# Altium PCB HS-IO-BaseBoard.PcbDoc (part 1 of 4)
Units mm, origin at the board's own origin, x right, y up, seen from the top; angles counter-clockwise.
Board outline 157.7 x 86.4 mm, 6 copper layers (Top Layer, MidLayer1, InternalPlane1, InternalPlane2, MidLayer2, Bottom Layer); 214 components, 240 nets, 782 pads, 260 vias.
Unrouted connection lines stored in the file: 101.
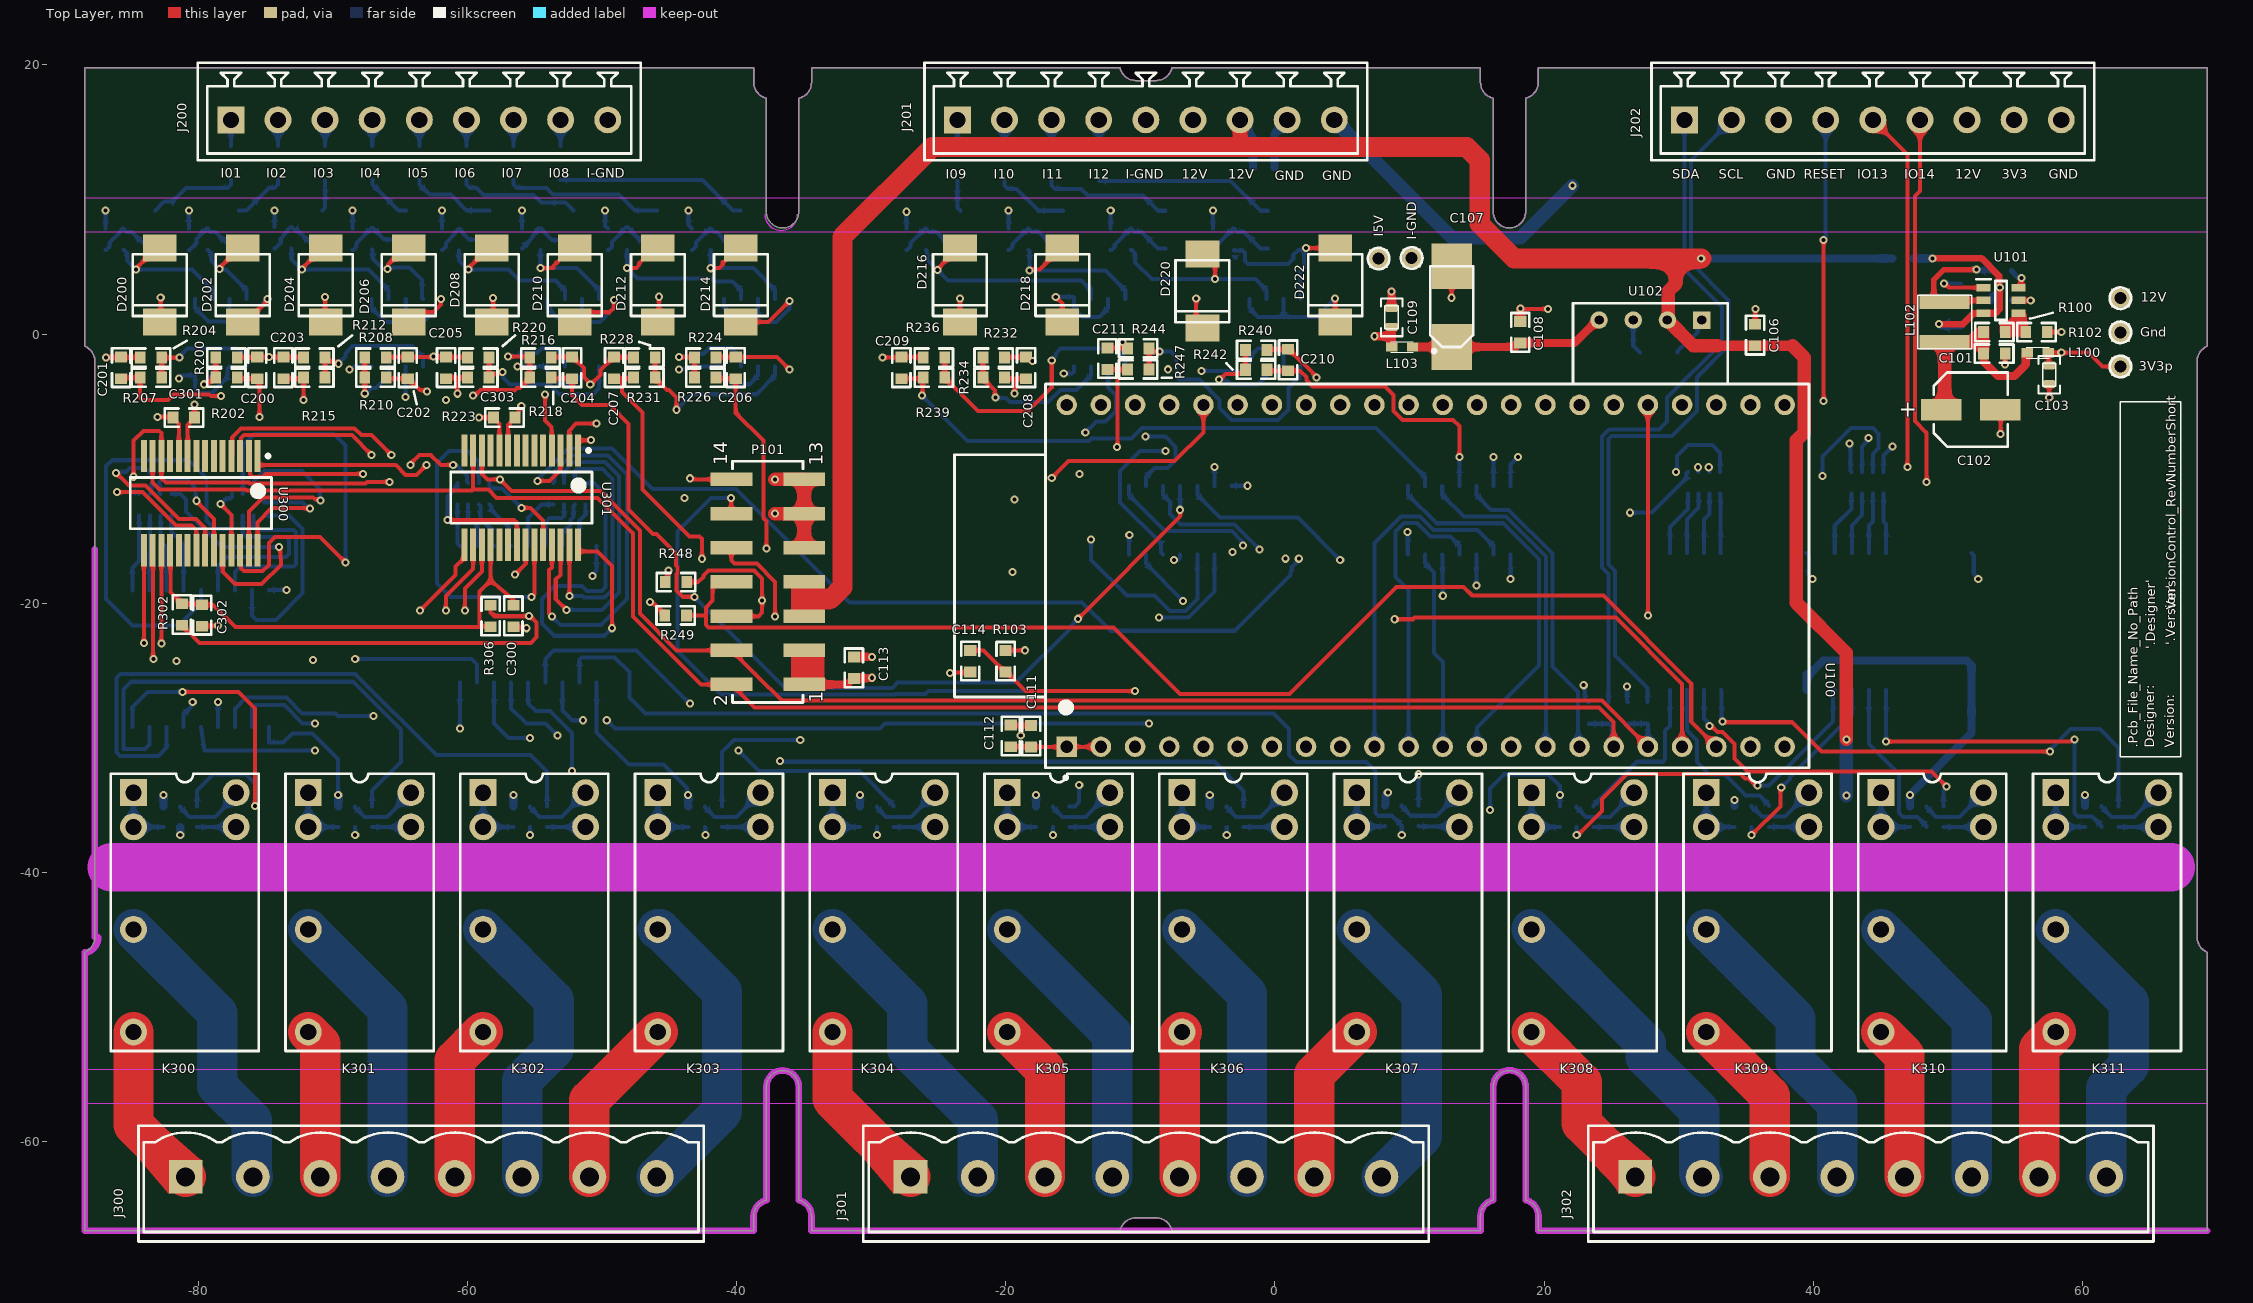
[diagram p0: Top Layer view]
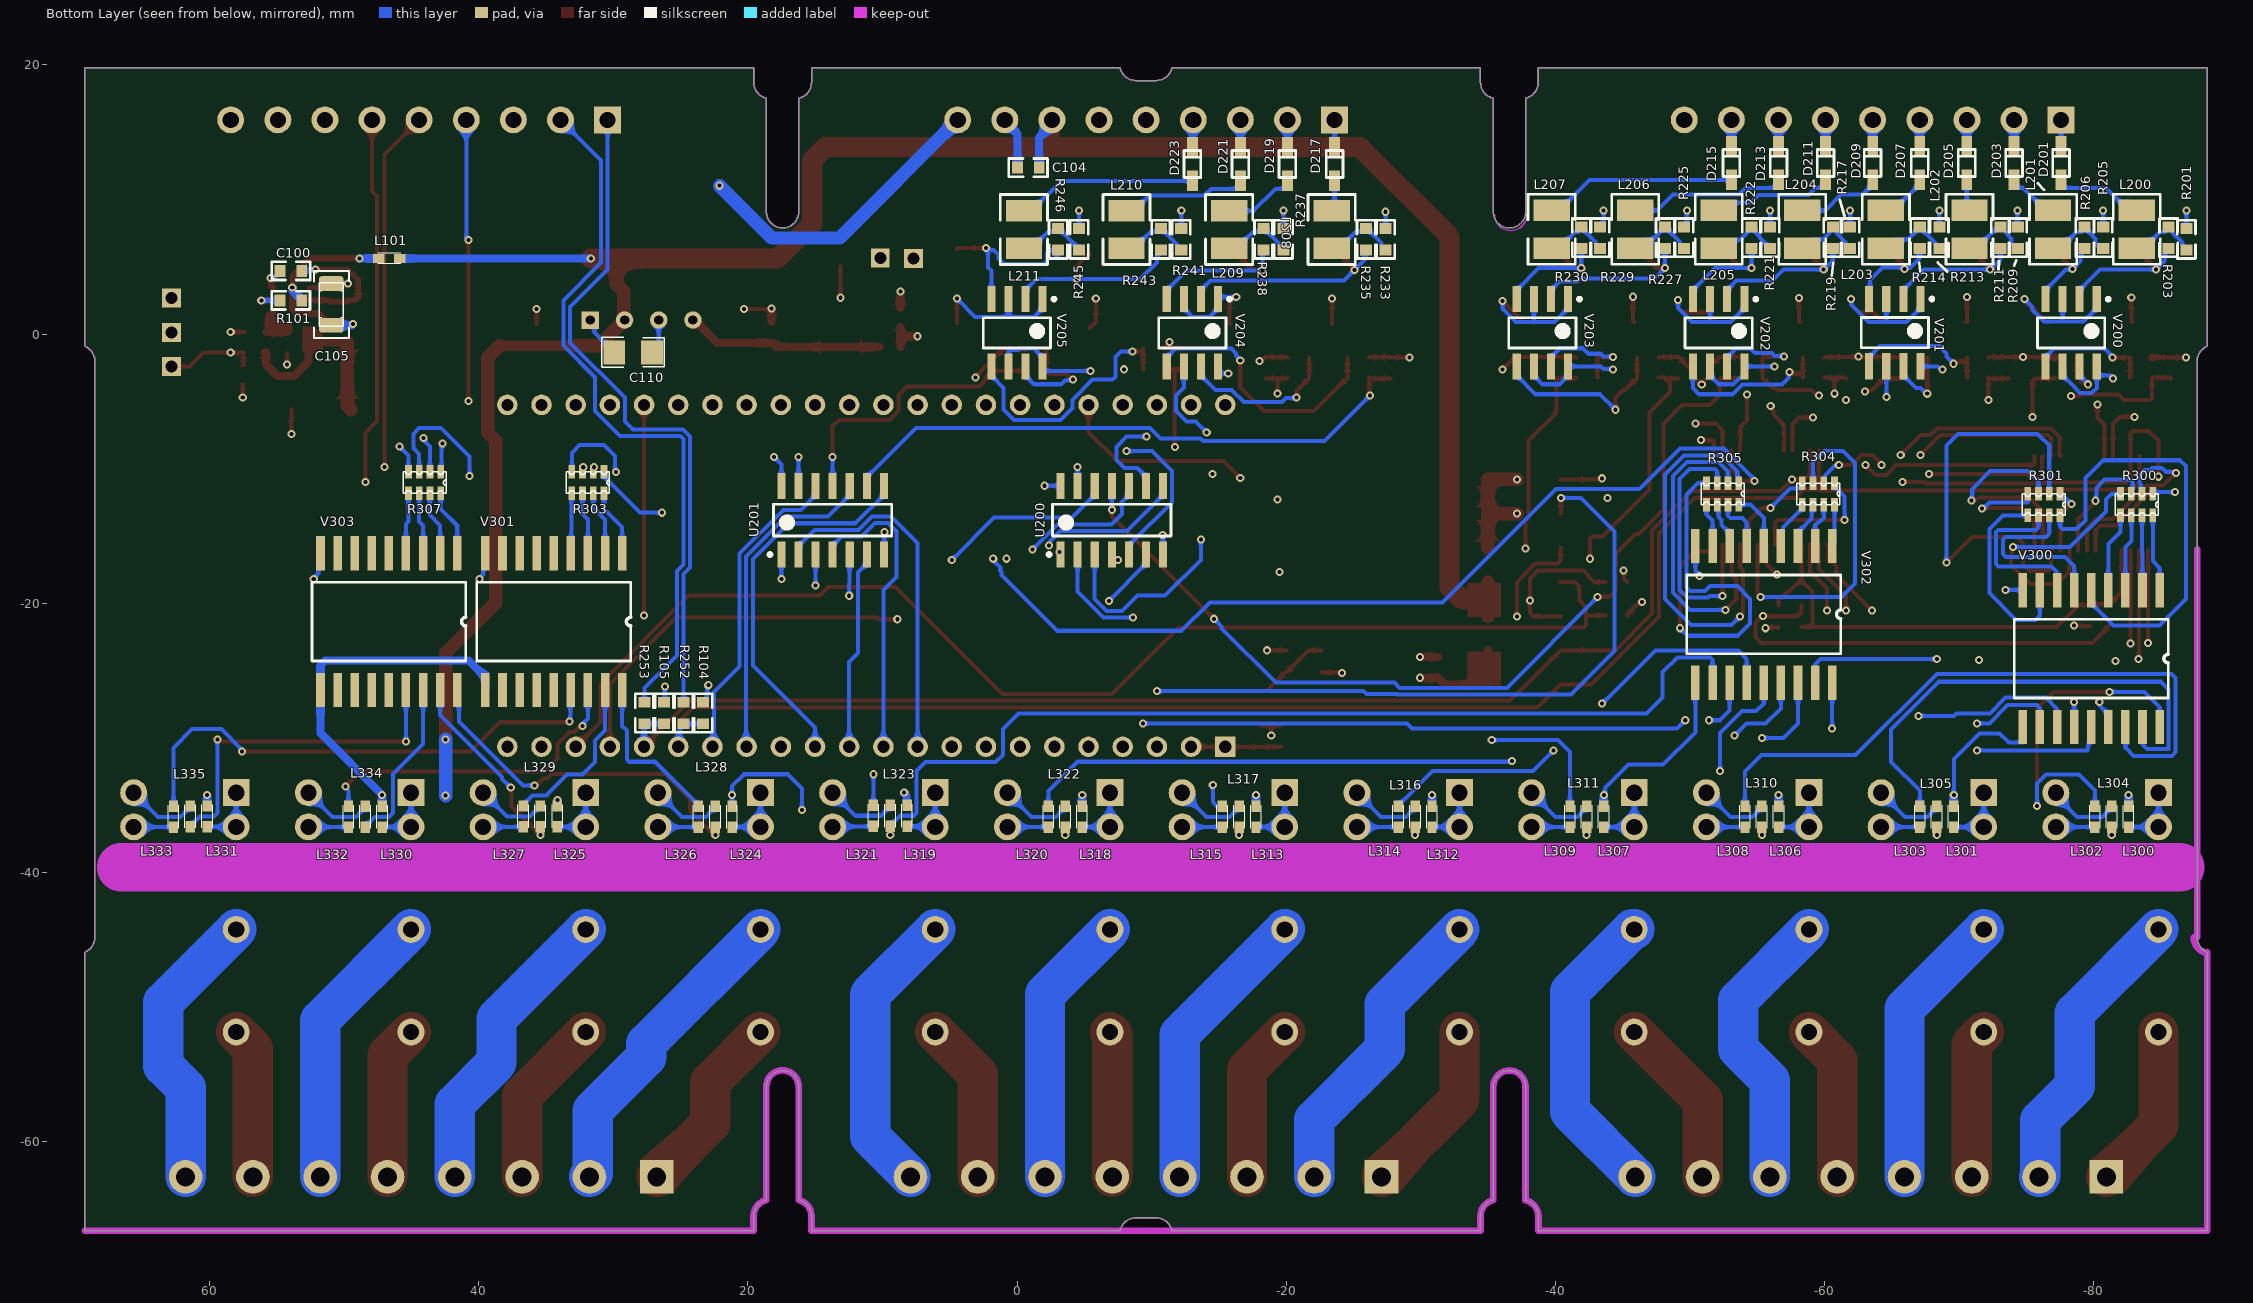
[diagram p1: Bottom Layer view, seen from below]
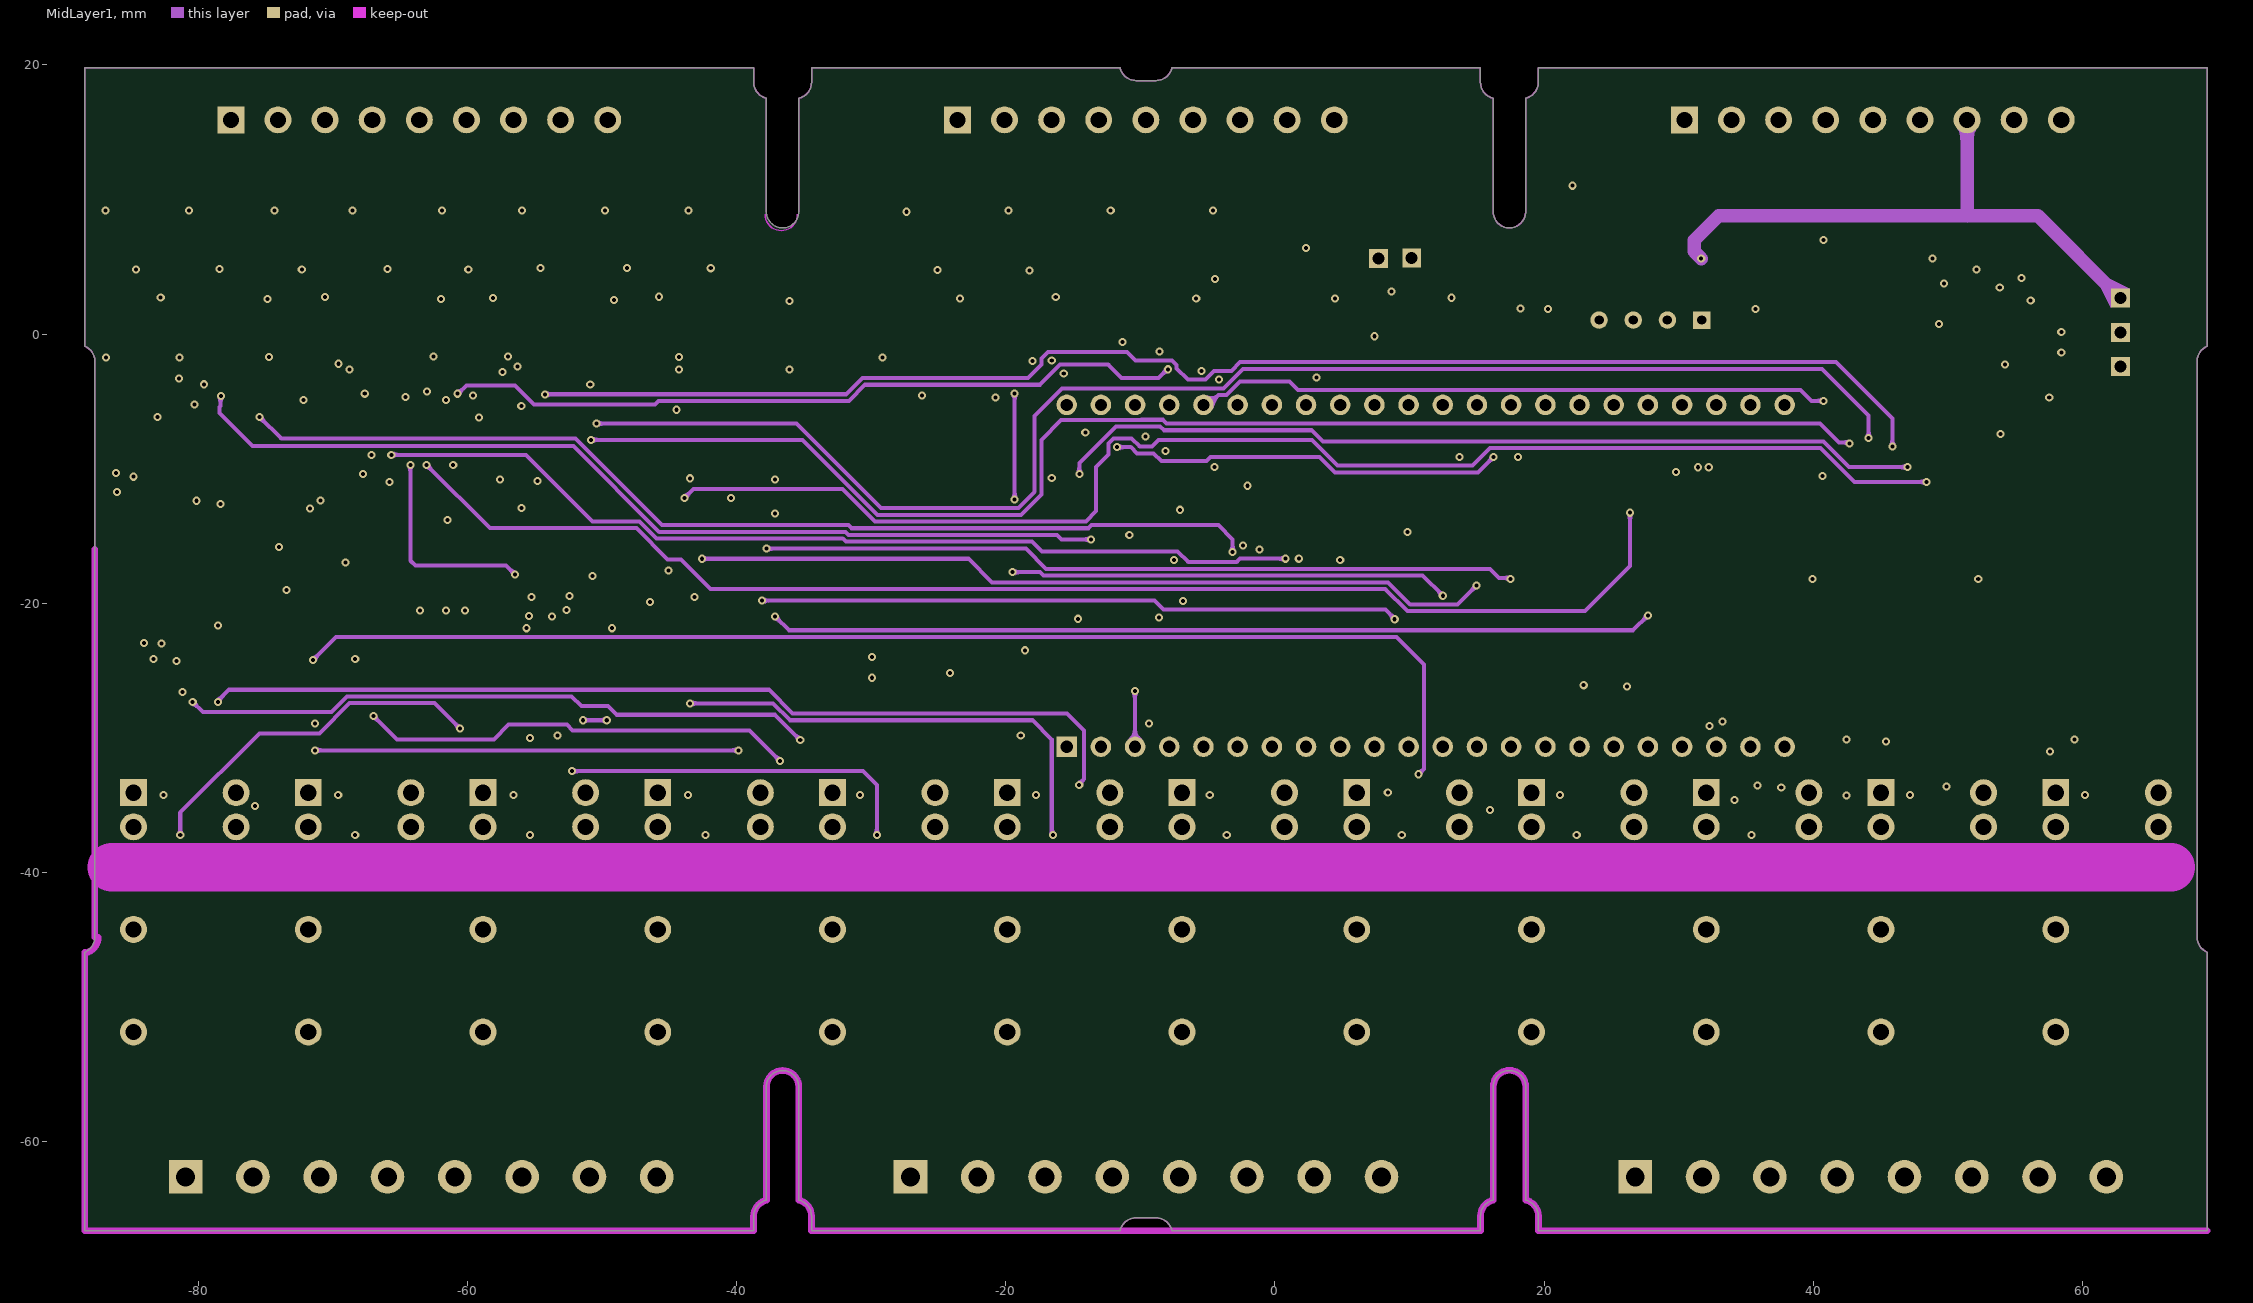
[diagram p2: MidLayer1]
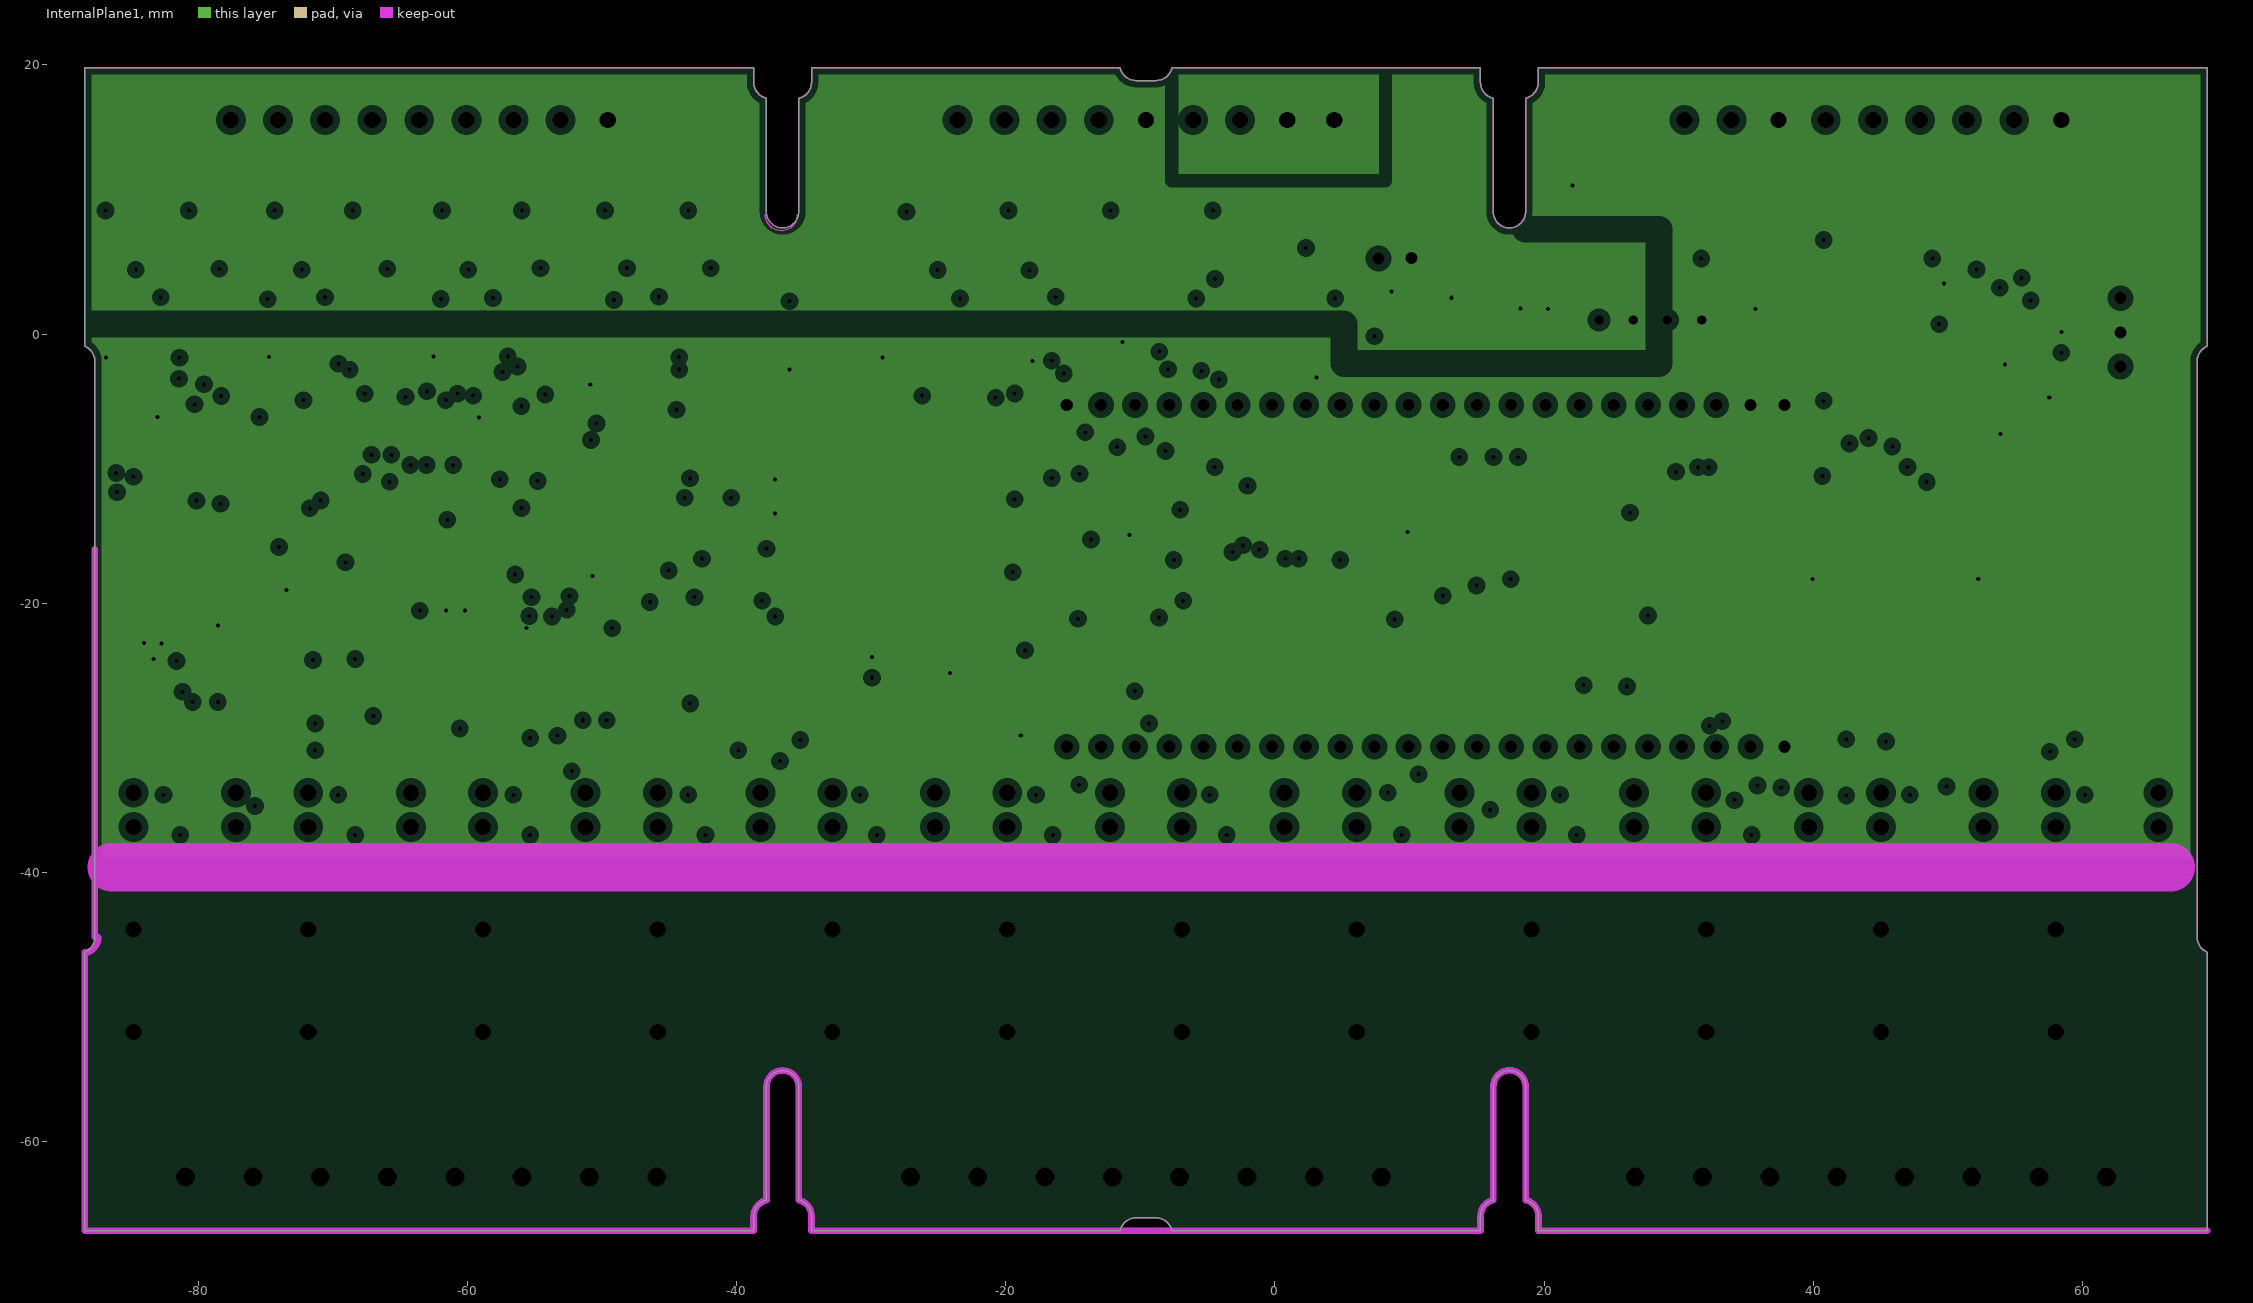
[diagram p3: InternalPlane1, clearances drawn from the general rule]
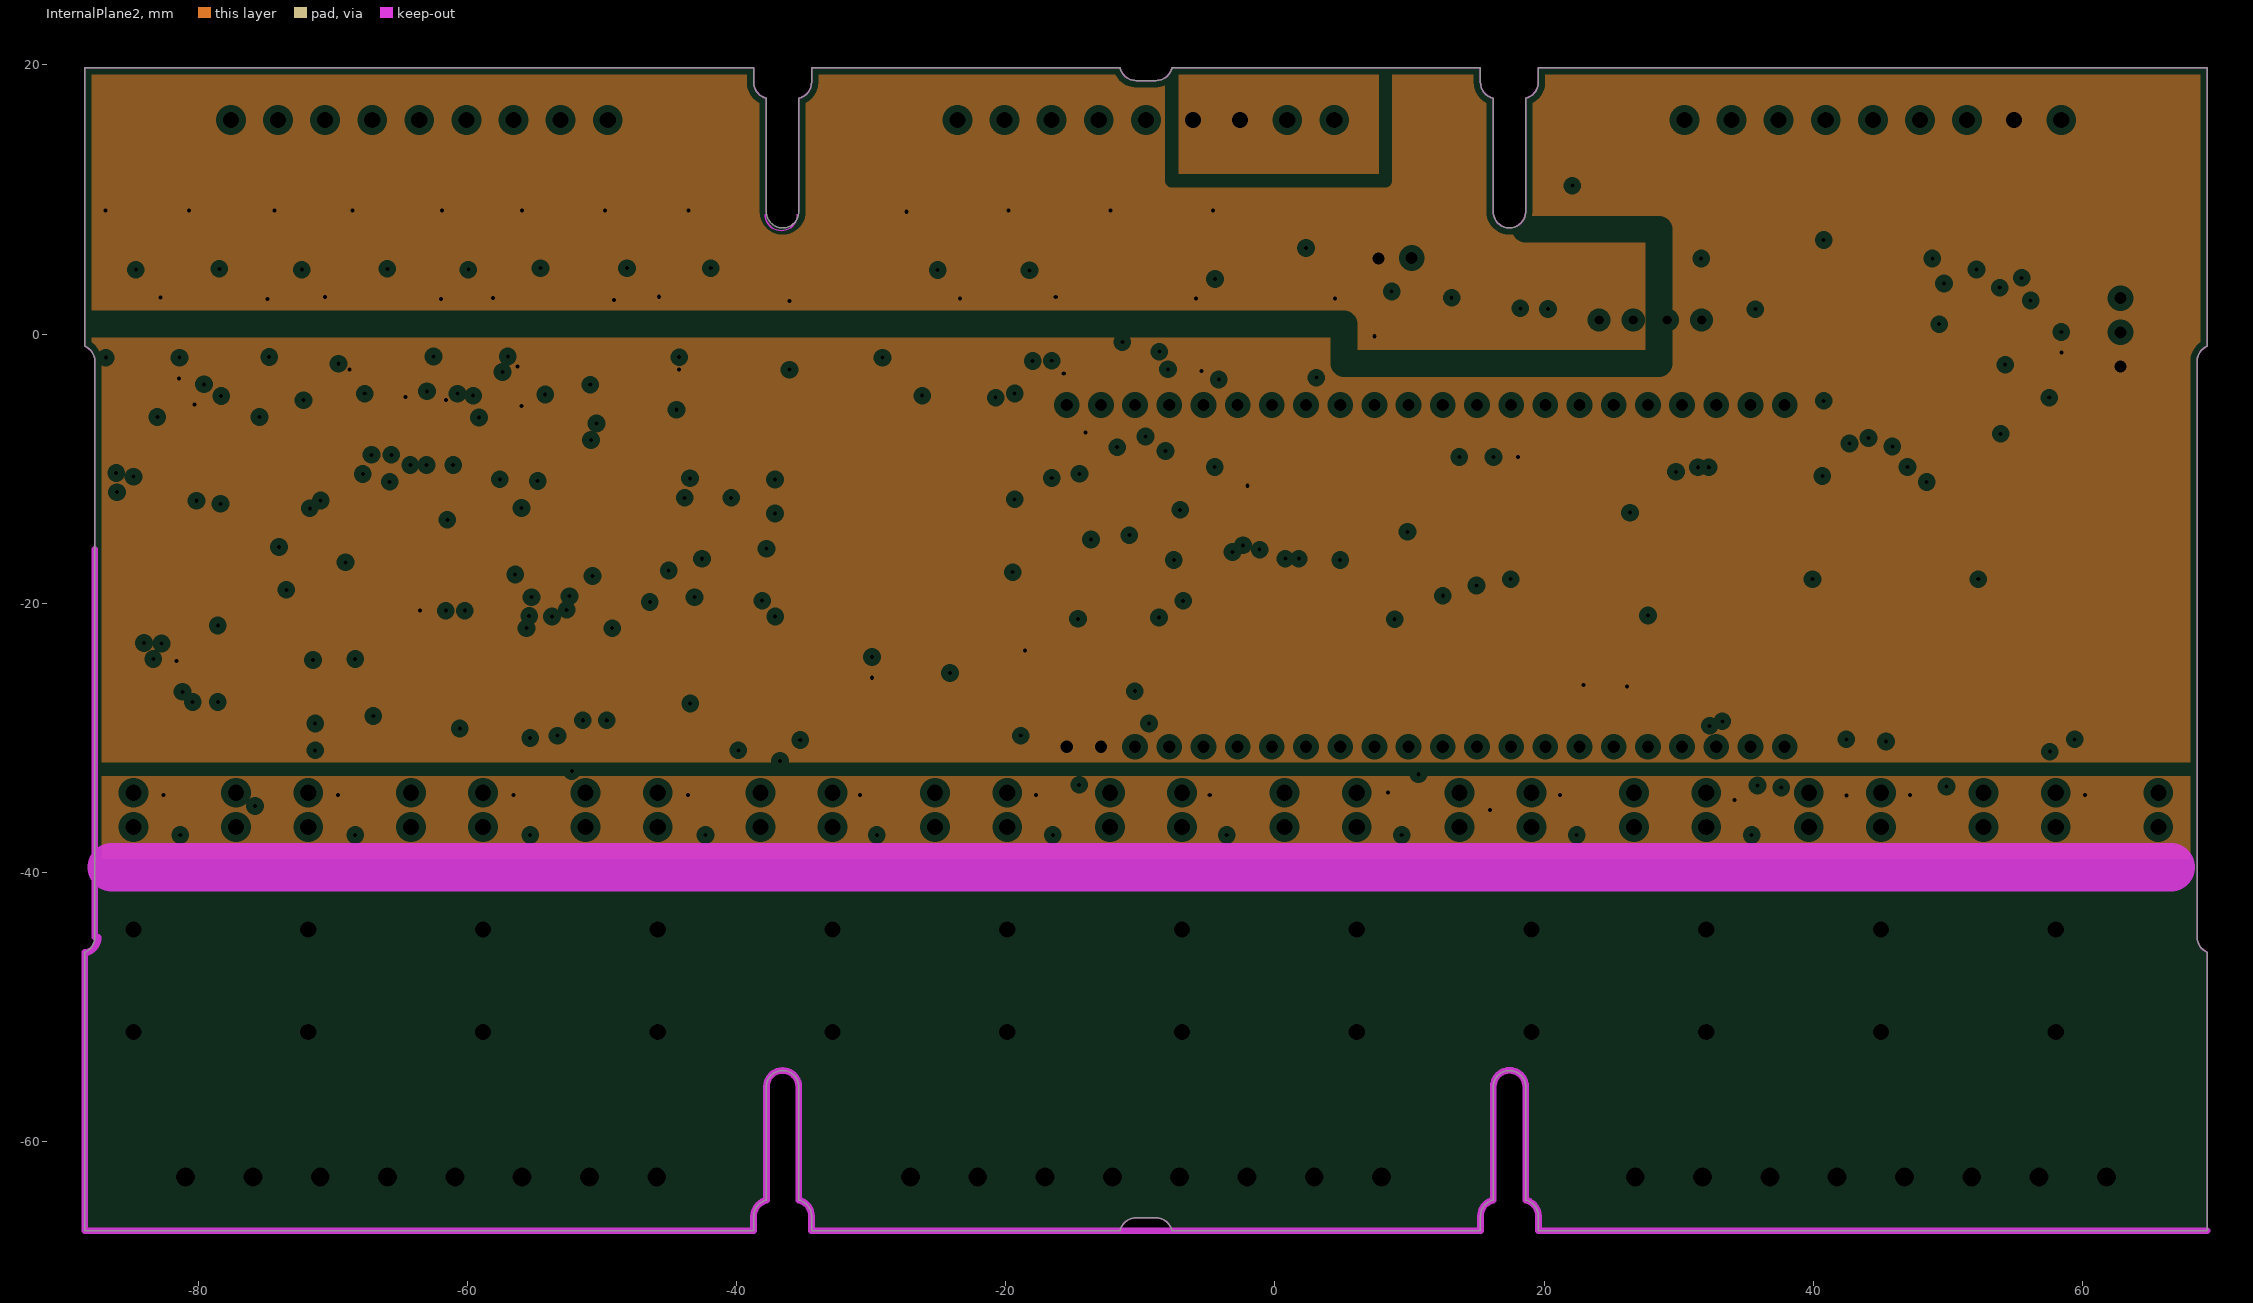
[diagram p4: InternalPlane2, clearances drawn from the general rule]
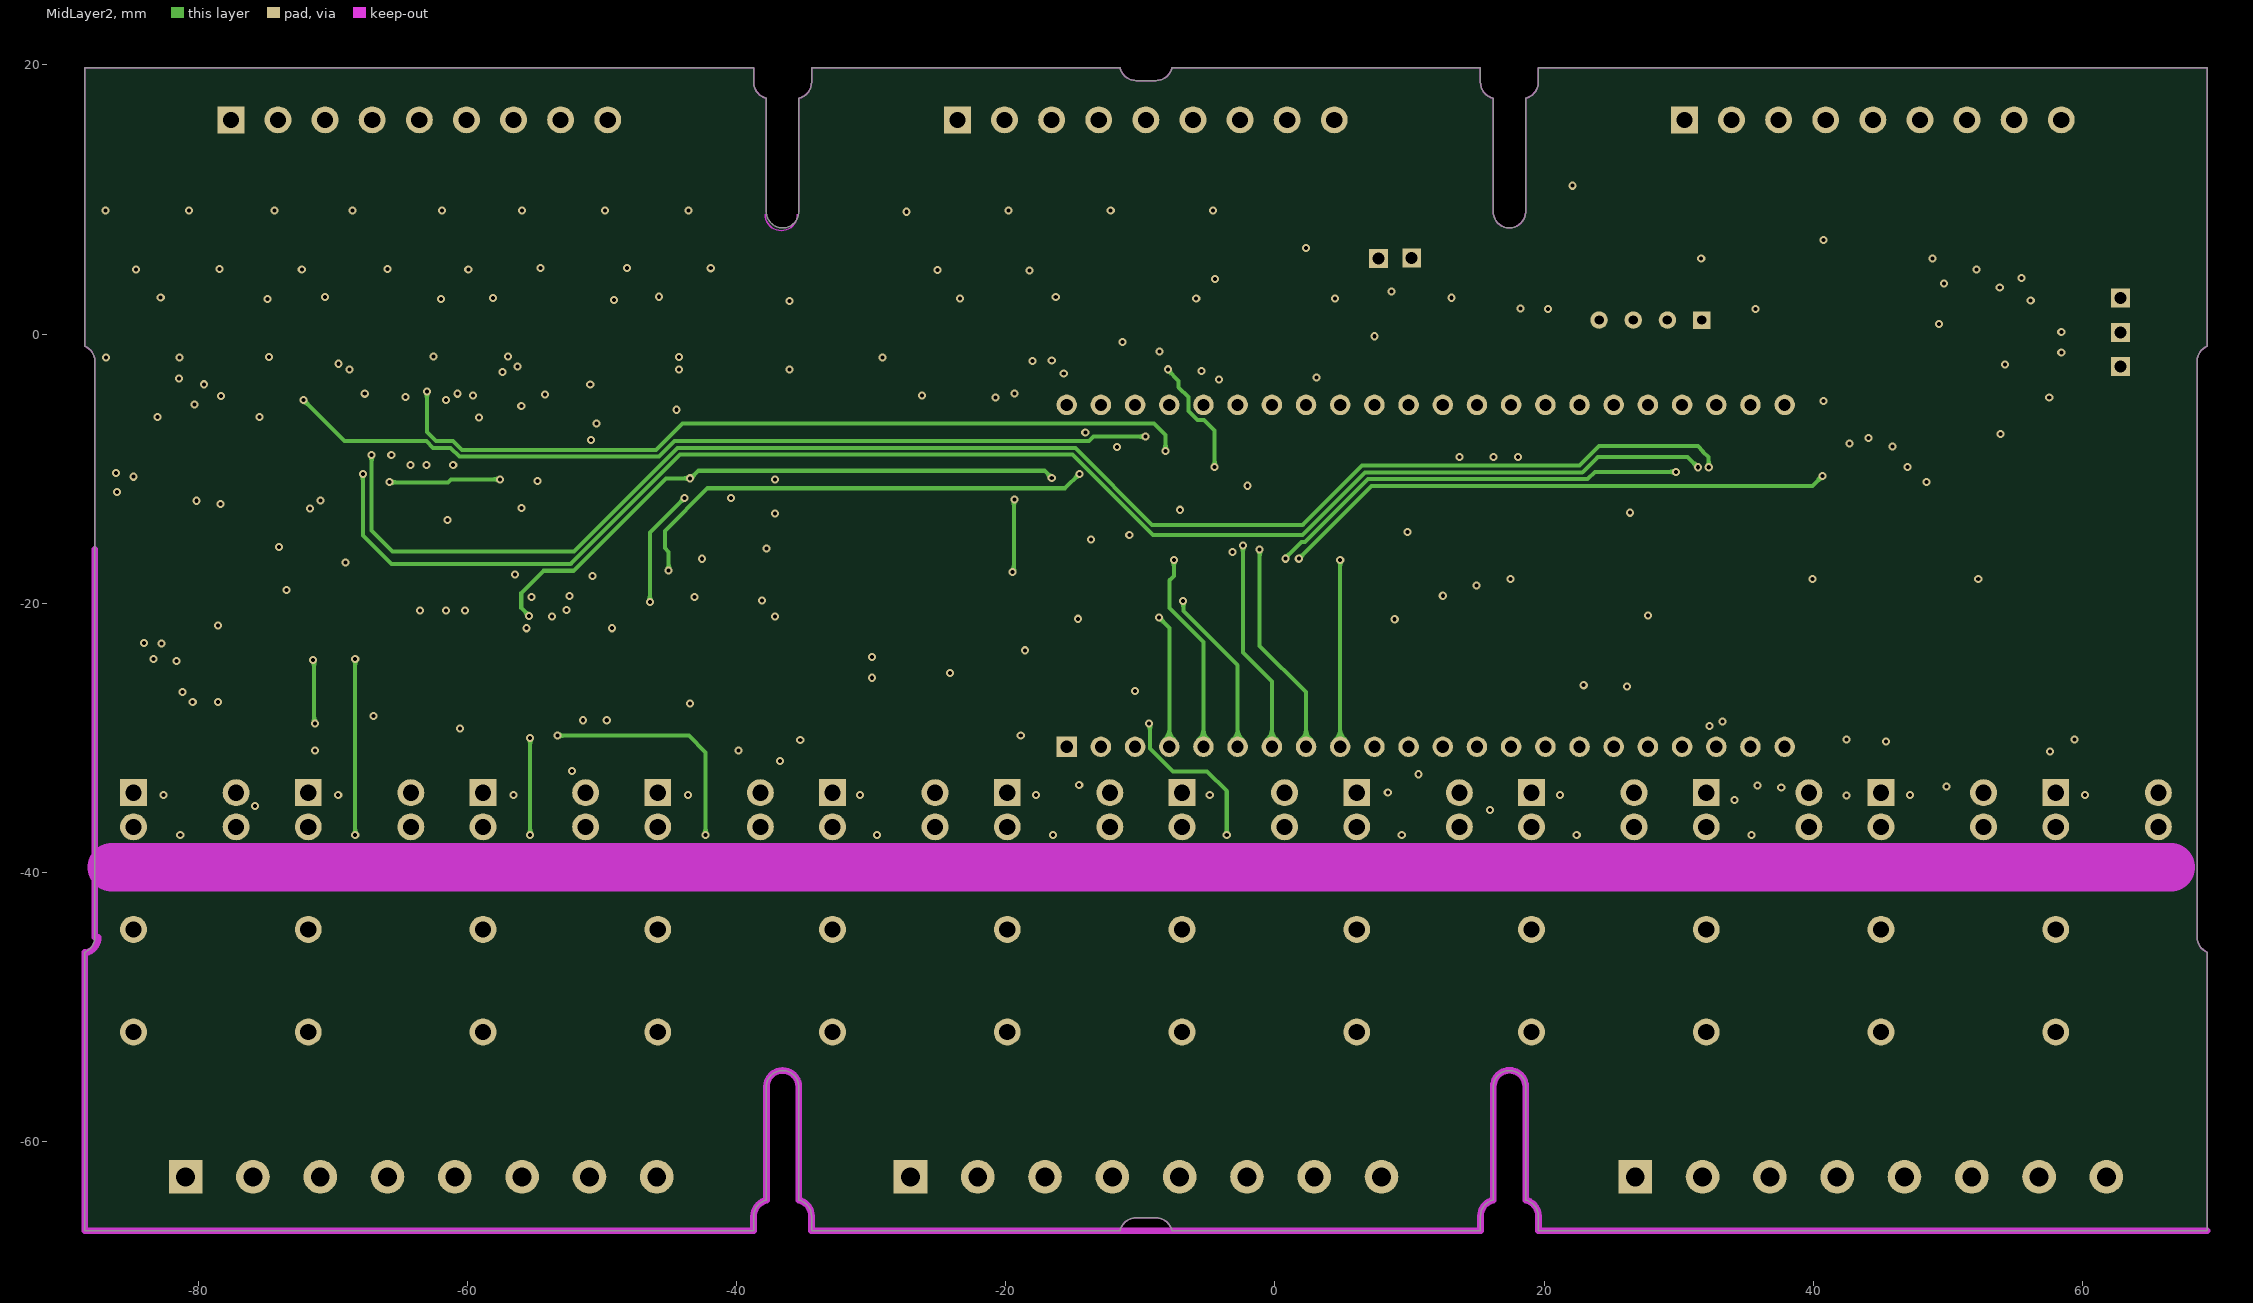
[diagram p5: MidLayer2]

## Layer stack, top to bottom
Top Solder: solder mask 0.01, Solder Resist, Dk 3.5
Top Layer: signal copper 0.035
Dielectric1: core 0.32, FR-4, Dk 4.8
MidLayer1: signal copper 0.035
Dielectric2: prepreg 0.32, FR-4, Dk 4.8
InternalPlane1: plane copper 0.035, net (Multiple Nets)
Dielectric4: core 0.32, FR-4, Dk 4.8
InternalPlane2: plane copper 0.035, net (Multiple Nets)
Dielectric5: prepreg 0.32, FR-4, Dk 4.8
MidLayer2: signal copper 0.035
Dielectric3: core 0.32, FR-4, Dk 4.8
Bottom Layer: signal copper 0.035
Bottom Solder: solder mask 0.01, Solder Resist, Dk 3.5

## Board outline
-88.429,-66.608 -38.729,-66.608 -38.729,-65.528 cw(c-37.511,-65.528) -37.778,-64.339 -37.779,-64.339 -37.779,-55.908 cw(c-36.579,-55.908) -35.379,-55.908 -35.379,-64.339 -35.381,-64.339 cw(c-35.647,-65.528) -34.429,-65.528 -34.429,-66.608 -11.503,-66.609 cw(c-10.329,-66.858) -10.329,-65.658 -8.829,-65.658 cw(c-8.829,-66.858) -7.655,-66.609 15.271,-66.608 15.271,-65.528 cw(c16.489,-65.528) 16.222,-64.339 16.221,-64.339 16.221,-55.908 cw(c17.421,-55.908) 18.621,-55.908 18.621,-64.339 18.619,-64.339 cw(c18.353,-65.528) 19.571,-65.528 19.571,-66.608 69.271,-66.608 69.266,-45.919 cw(c69.721,-44.808) 68.521,-44.808 68.521,-2.008 cw(c69.721,-2.008) 69.266,-0.898 69.271,19.792 19.571,19.792 19.571,18.711 cw(c18.353,18.711) 18.619,17.522 18.621,17.522 18.621,9.092 cw(c17.421,9.092) 16.221,9.092 16.221,17.522 16.222,17.522 cw(c16.489,18.711) 15.271,18.711 15.271,19.792 -7.654,19.792 -7.655,19.792 cw(c-8.829,20.041) -8.829,18.842 -10.329,18.842 cw(c-10.329,20.042) -11.503,19.792 -11.504,19.792 -34.429,19.792 -34.429,18.711 cw(c-35.647,18.711) -35.381,17.522 -35.379,17.522 -35.379,9.092 cw(c-36.579,9.092) -37.779,9.092 -37.779,17.522 -37.778,17.522 cw(c-37.511,18.711) -38.729,18.711 -38.729,19.792 -88.429,19.792 -88.425,-0.898 cw(c-88.879,-2.008) -87.679,-2.008 -87.679,-44.808 cw(c-88.879,-44.809) -88.425,-45.919

## Design rules (kind name [scope] priority, off if disabled: settings)
AssemblyTestPointUsage [All] p1 off:
AssemblyTestpoint [All] p1 off: testpointundercomponent=TRUE minsize=1.016 maxsize=2.54 preferedsize=1.524 minholesize=0 maxholesize=1.016 preferedholesize=0.813 testpointgrid=0.025 usegrid=TRUE gridtolerance=0 allowsidetop=TRUE allowsidebottom=TRUE
Clearance 240_To_Self [InNetClass('240V') vs IsElectrical] p1: gap=2 ignorepadtopadclearanceinfootprint=TRUE // Abstände Innerhalb der 240V-Klasse
Clearance 240_To_All [IsElectrical And InNetClass('240V') vs IsElectrical  And Not InNetClass('240V')] p2: gap=4 ignorepadtopadclearanceinfootprint=FALSE // 240V zum Rest hat 4mm Abstand
Clearance [All] p3: gap=0.2 ignorepadtopadclearanceinfootprint=TRUE except(0: Arc-Hole Track-Hole SMDPad-Hole THPad-Hole Via-Hole Fill-Hole Poly-Hole Region-Hole Text-Hole)
ComponentClearance ComponentClearance_1 [InComponent('R639') vs InComponent('Q600')] p1: gap=-15 collisioncheckmode=3 verticalgap=2540 showdistances=FALSE
ComponentClearance ComponentClearance_2 [InComponent('R640') vs InComponent('Q601')] p2: gap=-15 collisioncheckmode=3 verticalgap=2540 showdistances=FALSE
ComponentClearance ComponentClearance_3 [InComponent('R641') vs InComponent('Q602')] p3: gap=-15 collisioncheckmode=3 verticalgap=2540 showdistances=FALSE
ComponentClearance [All] p4: gap=0.1 collisioncheckmode=3 verticalgap=0 showdistances=FALSE
FabricationTestPointUsage TestPointUsage [All] p1 off: valid=0 allowmultiple=FALSE
FabricationTestpoint Testpoint [(IsPad And (OnTopLayer Or OnBottomLayer))] p1 off: side=3 testpointundercomponent=TRUE minsize=1.016 maxsize=2.54 preferedsize=1.524 minholesize=0 maxholesize=1.016 preferedholesize=0.813 testpointgrid=0.025 allowsidetop=TRUE allowsidebottom=TRUE usegrid=TRUE gridtolerance=0
Height [All] p1: minheight=0 maxheight=35 prefheight=12.7
HoleSize [All] p1: absolutevalues=TRUE maxlimit=4 minlimit=0.025 maxpercent=80.000 minpercent=20.000
MinimumSolderMaskSliver [All] p1 off: minsoldermaskwidth=0.254
PlaneClearance [All] p1: clearance=0.508
PlaneConnect PlaneConnect_Via [IsVia] p1: planeconnectstyle=Direct reliefexpansion=0.508 reliefentries=4 reliefconductorwidth=0.254 reliefairgap=0.254
PlaneConnect [All] p2: planeconnectstyle=Relief reliefexpansion=0.3 reliefentries=4 reliefconductorwidth=0.3 reliefairgap=0.2
PolygonConnect PolygonConnect_3 [All vs IsNamedPolygon('NONET_L-01_P-001')] p1: connectstyle=Direct reliefconductorwidth=0.254 reliefentries=4 polygonreliefangle="90 Angle" airgapwidth=0.254
PolygonConnect PolygonConnect_2 [All vs IsNamedPolygon('NONET_L-01_P-001')] p2: connectstyle=Direct reliefconductorwidth=0.254 reliefentries=4 polygonreliefangle="90 Angle" airgapwidth=0.254
PolygonConnect PolygonConnect_1 [InNet('0V')] p3: connectstyle=Direct reliefconductorwidth=0.254 reliefentries=4 polygonreliefangle="90 Angle" airgapwidth=0.254
PolygonConnect [All] p4: connectstyle=Relief reliefconductorwidth=0.254 reliefentries=4 polygonreliefangle="90 Angle" airgapwidth=0.254
RoutingVias [All] p1: holewidth=0.3 width=0.8 viastyle="Through Hole" minholewidth=0.3 minwidth=0.6 maxholewidth=0.8 maxwidth=1.5
SMDNeckDown [All] p1: percent=100.000
SilkToSolderMaskClearance SilkscreenOverComponentPads [IsPad] p1: minsilkscreentomaskgap=0.254 clearancetoexposedcopper=TRUE
SolderMaskExpansion [All] p1: expansion=0.102 istentingtop=FALSE
SupplyNets "Schematic Supply Nets_4" [InNet('I5V')] p1: voltage=0.000
SupplyNets "Schematic Supply Nets_6" [InNet('GND')] p2: voltage=0.000
SupplyNets "Schematic Supply Nets_3" [InNet('I-GND')] p3: voltage=0.000
SupplyNets "Schematic Supply Nets_1" [InNet('12V')] p4: voltage=0.000
SupplyNets "Schematic Supply Nets" [InNet('3V3p')] p5: voltage=0.000
Width Logo_1 [IsTrack And WithinRoom('Logo')] p1: maxlimit=0.254 minlimit=0.02 preferedwidth=0.254
Width [All] p2: maxlimit=4 minlimit=0.2 preferedwidth=0.3
19 further rules are at their usual default settings.

## Classes and differential pairs
net class 240V: K1A K1B K2A K2B K3A K3B K4A K4B K5A K5B K6A K6B K7A K7B K8A K8B K9A K9B K10A K10B K11A K11B K12A K12B
net class I-5V_Class: I01 I02 I03 I04 I05 I5V I06 I07 I08 I09 I10 I11 I12 I-GND NetD200_1 NetD201_1 NetD202_1 NetD203_1 NetD204_1 NetD205_1 NetD206_1 NetD207_1 NetD208_1 NetD209_1 NetD210_1 NetD211_1 NetD212_1 NetD213_1 NetD214_1 NetD215_1 NetD216_1 NetD217_1 NetD218_1 NetD219_1 NetD220_1 NetD221_1 NetD222_1 NetD223_1 NetL200_2 NetL201_2 NetL202_2 NetL203_2 NetL204_2 NetL205_2 NetL206_2 NetL207_2 NetL208_2 NetL209_2 NetL210_2 NetL211_2 P5V

## Components (designator, comment, footprint, x,y, rotation, side; value= is the part's Value field where it differs from the comment)
3V3p "(no part)" TESTPOINT 62.811,-2.408 r0 top
12V "(no part)" TESTPOINT 62.811,2.672 r90 top
C100 "100n" CC1608-0603 53.951,4.702 r180 bottom
C101 "100n" CC1608-0603 53.451,-1.448 r180 top
C102 "47u" WCAP-PSLP_D5H5.5 51.696,-5.608 r180 top
C103 "C-10N/50V_SMD-0603_X7R" 0603_SMD_T 57.526,-3.02 r270 top
C104 "100n" CC1608-0603 -0.84,12.367 r0 bottom
C105 "C-10U/35V_SMD-1206_X7R" 1206C_H0175_SMD_T 50.951,2.202 r90 bottom
C106 "100n" CC1608-0603 35.671,-0.059 r270 top
C107 "10u/10V" TA-C 13.129,2.041 r90 top
C108 "100n" CC1608-0603 18.229,0.141 r270 top
C109 "C-10N/50V_SMD-0603_X7R" 0603_SMD_T 8.669,1.241 r90 top
C110 "SMD_1206_4700p_1000V" CR3216-1206 28.521,-1.366 r180 bottom
C111 "C-10U/10V_SMD-0603_X5R" CC1608-0603 -18.119,-29.873 r90 top
C112 "100n" CC1608-0603 -19.628,-29.848 r270 top
C113 "100n" CC1608-0603 -31.279,-24.783 r270 top
C114 "100n" CC1608-0603 -22.633,-24.302 r90 top
C200 "470n" CC1608-0603 -75.609,-2.508 r90 top
C201 "470n" CC1608-0603 -85.729,-2.508 r90 top
C202 "470n" CC1608-0603 -64.427,-2.508 r90 top
C203 "470n" CC1608-0603 -73.668,-2.508 r90 top
C204 "470n" CC1608-0603 -52.219,-2.508 r90 top
C205 "470n" CC1608-0603 -61.579,-2.508 r90 top
C206 "470n" CC1608-0603 -40.062,-2.508 r90 top
C207 "470n" CC1608-0603 -49.101,-2.508 r90 top
C208 "470n" CC1608-0603 -18.493,-2.508 r90 top
C209 "470n" CC1608-0603 -27.752,-2.508 r90 top
C210 "470n" CC1608-0603 0.983,-1.925 r90 top
C211 "470n" CC1608-0603 -12.454,-1.822 r90 top
C300 "SMD_0603_100n_1" CC1608-0603 -56.579,-20.948 r90 top
C301 "SMD_0603_100n_1" CC1608-0603 -81.064,-6.196 r0 top
C302 "SMD_0603_100n_1" CC1608-0603 -79.704,-20.898 r90 top
C303 "SMD_0603_100n_1" CC1608-0603 -57.254,-6.196 r0 top
D200 "SMBJ20A-TR" SMB -82.854,3.641 r270 top
D201 "BAS316" SOD323F -77.568,12.717 r90 bottom
D202 "SMBJ20A-TR" SMB -76.686,3.641 r270 top
D203 "BAS316" SOD323F -74.068,12.717 r90 bottom
D204 "SMBJ20A-TR" SMB -70.518,3.641 r270 top
D205 "BAS316" SOD323F -70.558,12.717 r90 bottom
D206 "SMBJ20A-TR" SMB -64.351,3.641 r270 top
D207 "BAS316" SOD323F -67.061,12.717 r90 bottom
D208 "SMBJ20A-TR" SMB -58.183,3.641 r270 top
D209 "BAS316" SOD323F -63.565,12.717 r90 bottom
D210 "SMBJ20A-TR" SMB -52.015,3.641 r270 top
D211 "BAS316" SOD323F -60.068,12.717 r90 bottom
D212 "SMBJ20A-TR" SMB -45.847,3.641 r270 top
D213 "BAS316" SOD323F -56.572,12.717 r90 bottom
D214 "SMBJ20A-TR" SMB -39.679,3.641 r270 top
D215 "BAS316" SOD323F -53.076,12.717 r90 bottom
D216 "SMBJ20A-TR" SMB -23.402,3.641 r270 top
D217 "BAS316" SOD323F -23.59,12.642 r90 bottom
D218 "SMBJ20A-TR" SMB -15.793,3.641 r270 top
D219 "BAS316" SOD323F -20.09,12.642 r90 bottom
D220 "SMBJ20A-TR" SMB -5.383,3.192 r270 top
D221 "BAS316" SOD323F -16.59,12.642 r90 bottom
D222 "SMBJ20A-TR" SMB 4.478,3.641 r270 top
D223 "BAS316" SOD323F -13.027,12.642 r90 bottom
Gnd "(no part)" TESTPOINT 62.811,0.132 r0 top
I5V "(no part)" TESTPOINT 7.704,5.611 r0 top
I-GND "(no part)" TESTPOINT 10.159,5.654 r0 top
J200 "MCV 1,5/ 9-G-3,5" "MCV1,5/9-G-3,5 - I" -63.568,15.917 r180 top locked
J201 "MCV 1,5/ 9-G-3,5" "MCV1,5/9-G-3,5 - I" -9.59,15.917 r180 top locked
J202 "MCV 1,5/ 9-G-3,5" "MCV1,5/9-G-3,5 - I" 44.421,15.917 r180 top locked
J300 "MSTBVA 2,5/ 8-G" "MSTBVA2,5/8-G - I" -63.429,-62.608 r180 top locked
J301 "MSTBVA 2,5/ 8-G" "MSTBVA2,5/8-G - I" -9.579,-62.608 r180 top locked
J302 "MSTBVA 2,5/ 8-G" "MSTBVA2,5/8-G - I" 44.271,-62.608 r180 top locked
K300 "DSP1a-L2-DC12V" DS-P16 -80.989,-42.958 r270 top locked
K301 "DSP1a-L2-DC12V" DS-P16 -68.006,-42.958 r270 top locked
K302 "DSP1a-L2-DC12V" DS-P16 -55.024,-42.958 r270 top locked
K303 "DSP1a-L2-DC12V" DS-P16 -42.041,-42.958 r270 top locked
K304 "DSP1a-L2-DC12V" DS-P16 -29.058,-42.958 r270 top locked
K305 "DSP1a-L2-DC12V" DS-P16 -16.076,-42.958 r270 top locked
K306 "DSP1a-L2-DC12V" DS-P16 -3.093,-42.958 r270 top locked
K307 "DSP1a-L2-DC12V" DS-P16 9.89,-42.958 r270 top locked
K308 "DSP1a-L2-DC12V" DS-P16 22.873,-42.958 r270 top locked
K309 "DSP1a-L2-DC12V" DS-P16 35.855,-42.958 r270 top locked
K310 "DSP1a-L2-DC12V" DS-P16 48.838,-42.958 r270 top locked
K311 "DSP1a-L2-DC12V" DS-P16 61.821,-42.958 r270 top locked
L100 "BMC-Q1JY0600H" 0603-Ferrit 56.671,-1.381 r0 top
L101 "BMC-Q1JY0600H" 0603-Ferrit 46.646,5.617 r0 bottom
L102 "ASPI-4020S-3R3M-T" ASPI-4020S 49.751,0.902 r270 top
L103 "742792651" 0603-Ferrit 9.444,-0.959 r180 top
L200 "B82422_330uH" CR3225-1210 -83.179,7.792 r270 bottom
L201 "B82422_330uH" CR3225-1210 -76.97,7.792 r270 bottom
L202 "B82422_330uH" CR3225-1210 -70.76,7.792 r270 bottom
L203 "B82422_330uH" CR3225-1210 -64.55,7.792 r270 bottom
L204 "B82422_330uH" CR3225-1210 -58.341,7.792 r270 bottom
L205 "B82422_330uH" CR3225-1210 -52.131,7.792 r270 bottom
L206 "B82422_330uH" CR3225-1210 -45.921,7.792 r270 bottom
L207 "B82422_330uH" CR3225-1210 -39.712,7.792 r270 bottom
L208 "B82422_330uH" CR3225-1210 -23.372,7.767 r270 bottom
L209 "B82422_330uH" CR3225-1210 -15.752,7.767 r270 bottom
L210 "B82422_330uH" CR3225-1210 -8.132,7.767 r270 bottom
L211 "B82422_330uH" CR3225-1210 -0.512,7.767 r270 bottom
L300 "742792651" 0603-Ferrit -82.579,-35.858 r270 bottom
L301 "742792651" 0603-Ferrit -69.579,-35.858 r270 bottom
L302 "742792651" 0603-Ferrit -80.079,-35.858 r270 bottom
L303 "742792651" 0603-Ferrit -67.079,-35.858 r270 bottom
L304 "742792651" 0603-Ferrit -81.329,-35.858 r90 bottom
L305 "742792651" 0603-Ferrit -68.329,-35.858 r90 bottom
L306 "742792651" 0603-Ferrit -56.579,-35.858 r270 bottom
L307 "742792651" 0603-Ferrit -43.579,-35.858 r270 bottom
L308 "742792651" 0603-Ferrit -54.079,-35.858 r270 bottom
L309 "742792651" 0603-Ferrit -41.079,-35.858 r270 bottom
L310 "742792651" 0603-Ferrit -55.329,-35.858 r90 bottom
L311 "742792651" 0603-Ferrit -42.329,-35.858 r90 bottom
L312 "742792651" 0603-Ferrit -30.829,-35.858 r270 bottom
L313 "742792651" 0603-Ferrit -17.749,-35.858 r270 bottom
L314 "742792651" 0603-Ferrit -28.329,-35.858 r270 bottom
L315 "742792651" 0603-Ferrit -15.249,-35.858 r270 bottom
L316 "742792651" 0603-Ferrit -29.579,-35.858 r90 bottom
L317 "742792651" 0603-Ferrit -16.499,-35.858 r90 bottom
L318 "742792651" 0603-Ferrit -4.829,-35.858 r270 bottom
L319 "742792651" 0603-Ferrit 8.171,-35.783 r270 bottom
L320 "742792651" 0603-Ferrit -2.329,-35.858 r270 bottom
L321 "742792651" 0603-Ferrit 10.671,-35.783 r270 bottom
L322 "742792651" 0603-Ferrit -3.579,-35.858 r90 bottom
L323 "742792651" 0603-Ferrit 9.421,-35.783 r90 bottom
L324 "742792651" 0603-Ferrit 21.171,-35.858 r270 bottom
L325 "742792651" 0603-Ferrit 34.151,-35.833 r270 bottom
L326 "742792651" 0603-Ferrit 23.671,-35.858 r270 bottom
L327 "742792651" 0603-Ferrit 36.691,-35.833 r270 bottom
L328 "742792651" 0603-Ferrit 22.421,-35.858 r90 bottom
L329 "742792651" 0603-Ferrit 35.421,-35.833 r90 bottom
L330 "742792651" 0603-Ferrit 47.171,-35.858 r270 bottom
L331 "742792651" 0603-Ferrit 60.171,-35.833 r270 bottom
L332 "742792651" 0603-Ferrit 49.671,-35.858 r270 bottom
L333 "742792651" 0603-Ferrit 62.671,-35.858 r270 bottom
L334 "742792651" 0603-Ferrit 48.421,-35.858 r90 bottom
L335 "742792651" 0603-Ferrit 61.421,-35.833 r90 bottom
P101 "61031421121" 61031421121 -37.679,-18.408 r90 top
R100 "31k6" CR1608-0603 53.451,0.152 r180 top
R101 "47k" CR1608-0603 53.951,2.502 r180 bottom
R102 "10k" CR1608-0603 56.576,0.152 r180 top
R103 "10k" CR1608-0603 -20.008,-24.302 r90 top
R104 "4k7" CC1608-0603 23.321,-28.148 r90 bottom
R105 "4k7" CC1608-0603 26.229,-28.148 r90 bottom
R200 "1k0" CR1608-0603 -77.899,-1.751 r0 top
R201 "3k3" CR1608-0603 -86.879,7.042 r270 bottom
R202 "3k3" CR1608-0603 -77.899,-3.233 r0 top
R203 "1k5" CR1608-0603 -85.554,7.167 r270 bottom
R204 "1k0" CR1608-0603 -83.504,-1.751 r180 top
R205 "3k3" CR1608-0603 -80.693,7.167 r270 bottom
R206 "1k5" CR1608-0603 -79.318,7.167 r270 bottom
R207 "3k3" CR1608-0603 -83.504,-3.233 r180 top
R208 "1k0" CR1608-0603 -66.822,-1.751 r0 top
R209 "3k3" CR1608-0603 -74.343,7.167 r270 bottom
R210 "3k3" CR1608-0603 -66.822,-3.233 r0 top
R211 "1k5" CR1608-0603 -73.062,7.167 r270 bottom
R212 "1k0" CR1608-0603 -71.368,-1.751 r180 top
R213 "3k3" CR1608-0603 -68.519,7.167 r270 bottom
R214 "1k5" CR1608-0603 -67.066,7.167 r270 bottom
R215 "3k3" CR1608-0603 -71.368,-3.233 r180 top
R216 "1k0" CR1608-0603 -54.569,-1.751 r0 top
R217 "3k3" CR1608-0603 -61.889,7.167 r270 bottom
R218 "3k3" CR1608-0603 -54.569,-3.233 r0 top
R219 "1k5" CR1608-0603 -60.609,7.167 r270 bottom
R220 "1k0" CR1608-0603 -59.183,-1.751 r180 top
R221 "3k3" CR1608-0603 -55.951,7.167 r270 bottom
R222 "1k5" CR1608-0603 -54.56,7.167 r270 bottom
R223 "3k3" CR1608-0603 -59.183,-3.233 r180 top
R224 "1k0" CR1608-0603 -42.316,-1.751 r0 top
R225 "3k3" CR1608-0603 -49.557,7.167 r270 bottom
R226 "3k3" CR1608-0603 -42.316,-3.233 r0 top
R227 "1k5" CR1608-0603 -48.142,7.167 r270 bottom
R228 "1k0" CR1608-0603 -46.847,-1.751 r180 top
R229 "3k3" CR1608-0603 -43.313,7.167 r270 bottom
R230 "1k5" CR1608-0603 -41.916,7.167 r270 bottom
R231 "3k3" CR1608-0603 -46.847,-3.233 r180 top
R232 "1k0" CR1608-0603 -20.897,-1.751 r0 top
R233 "3k3" CR1608-0603 -27.377,7.042 r270 bottom
R234 "3k3" CR1608-0603 -20.897,-3.233 r0 top
R235 "1k5" CR1608-0603 -25.937,7.042 r270 bottom
R236 "1k0" CR1608-0603 -25.337,-1.751 r180 top
R237 "3k3" CR1608-0603 -19.788,7.042 r270 bottom
R238 "1k5" CR1608-0603 -18.308,7.042 r270 bottom
R239 "3k3" CR1608-0603 -25.337,-3.233 r180 top
R240 "1k0" CR1608-0603 -1.392,-1.167 r0 top
R241 "3k3" CR1608-0603 -12.2,7.042 r270 bottom
R242 "3k3" CR1608-0603 -1.392,-2.65 r0 top
R243 "1k5" CR1608-0603 -10.68,7.042 r270 bottom
R244 "1k0" CR1608-0603 -10.157,-1.064 r180 top
R245 "3k3" CR1608-0603 -4.611,7.042 r270 bottom
R246 "1k5" CR1608-0603 -3.052,7.042 r270 bottom
R247 "3k3" CR1608-0603 -10.157,-2.622 r180 top
R248 "3k3" CR1608-0603 -44.5,-18.417 r0 top
R249 "3k3" CR1608-0603 -44.527,-20.894 r0 top
R252 "0R" CR1608-0603 24.775,-28.148 r270 bottom
R253 "0R" CR1608-0603 27.683,-28.148 r270 bottom
R300 "4k7" ARV241 -83.179,-12.666 r270 bottom
R301 "4k7" ARV241 -76.286,-12.666 r270 bottom
R302 "1k0" CR1608-0603 -81.204,-20.825 r270 top
R303 "4k7" ARV241 31.881,-11.033 r270 bottom
R304 "4k7" ARV241 -59.538,-11.866 r270 bottom
R305 "4k7" ARV241 -52.415,-11.866 r270 bottom
R306 "1k0" CR1608-0603 -58.269,-20.948 r90 top
R307 "4k7" ARV241 44.021,-11.033 r270 bottom
U100 "ESP32-S3-WROOM-1-N16R8" DIL-44-ESP32 11.2,-17.958 r90 top
U101 "AP62200WU-7" SOT95P280X100-6N 53.951,2.502 r0 top
U102 "SL4U-1205" SIP4_6mm 27.891,1.046 r180 top
U200 "SN74HCT14DR" SO14 -7.039,-13.825 r90 bottom
U201 "SN74HCT14DR" SO14 13.7,-13.825 r90 bottom
U300 "MCP23017-E/SS" SSOP-SS28_M -79.804,-12.558 r270 top
U301 "MCP23017-E/SS" SSOP-SS28_M -55.99,-12.141 r270 top
V200 "ILD213T" SOIC8 -78.311,0.1 r270 bottom
V201 "ILD213T" SOIC8 -65.211,0.108 r270 bottom
V202 "ILD213T" SOIC8 -52.125,0.1 r270 bottom
V203 "ILD213T" SOIC8 -39.031,0.1 r270 bottom
V204 "ILD213T" SOIC8 -13.027,0.1 r270 bottom
V205 "ILD213T" SOIC8 0.009,0.1 r270 bottom
V300 "TBD62083AFWG,EL" SOL-18 -79.804,-24.108 r270 bottom
V301 "TBD62083AFWG,EL" SOL-18 34.421,-21.358 r270 bottom
V302 "TBD62083AFWG,EL" SOL-18 -55.479,-20.816 r270 bottom
V303 "TBD62083AFWG,EL" SOL-18 46.671,-21.358 r270 bottom

## Footprints (in the part's own frame and the unit in brackets; to place one, negate y for a bottom-side part, rotate by r counter-clockwise, add the part's x,y. Pads: shape width x height; smd on the part's side, far side on the other; paste and mask are expansions set on the pad)
0603-Ferrit [mm]
  rect 0.85x0.7 smd: 1(-0.775,0) 2(0.775,0)
  silkscreen extent -0.85,-0.4 0.85,0.4, body extent -0.8,-0.4 0.8,0.4, height 1
0603_SMD_T [mm]
  rrect67% 0.6x1 smd: 1(-0.7,0) 2(0.7,0)
  silkscreen extent -1.4,-0.8 1.4,0.8, body extent -0.8,-0.4 0.8,0.4, height 0.6
1206C_H0175_SMD_T [mm]
  rrect36% 1.1x1.8 smd: 1(-1.55,0) 2(1.55,0)
  silkscreen extent -2.5,-1.3 2.5,1.3, body extent -1.7,-0.9 1.7,0.9, height 1.7
61031421121 [mm] "Pin Header, pitch 2.54 mm, SMD, Vertical, dual row, 14p"
  rect 1x3.1 smd: 1(-7.62,-2.7) 2(-7.62,2.7) 3(-5.08,-2.7) 4(-5.08,2.7) 5(-2.54,-2.7) 6(-2.54,2.7) 7(0,-2.7) 8(0,2.7) 9(2.54,-2.7) 10(2.54,2.7) 11(5.08,-2.7) 12(5.08,2.7) 13(7.62,-2.7) 14(7.62,2.7)
  silkscreen extent -8.96,-2.61 8.96,2.61, body extent -8.89,-3.75 8.89,3.75, height 9.62
ARV241 [mm]
  rect 1x0.5 smd: 1(-0.8,1.2) 2(-0.8,0.4) 3(-0.8,-0.4) 4(-0.8,-1.2) 5(0.8,-1.2) 6(0.8,-0.4) 7(0.8,0.4) 8(0.8,1.2)
  silkscreen extent -0.8,-1.6 0.8,1.6, body extent -0.8,-1.6 0.8,1.6, height 0.6
ASPI-4020S [mm]
  rect 1.1x3.7 smd: 1(-1.5,0) 2(1.5,0)
  silkscreen extent -2,-2 2,2, body extent -2,-2 2,2, height 2
CC1608-0603 [mm]
  rect 0.8x0.9 smd: 1(-0.8,0) 2(0.8,0)
  silkscreen extent -1.42,-0.67 1.45,0.68, body extent -0.8,-0.4 0.8,0.4, height 1
CR1608-0603 [mm]
  rect 0.8x0.9 smd: 1(-0.8,0) 2(0.8,0)
  silkscreen extent -1.43,-0.67 1.43,0.67, body extent -0.8,-0.4 0.8,0.4, height 1
CR3216-1206 [mm]
  rect 1.6x1.8 smd: 1(-1.4,0) 2(1.4,0)
  silkscreen extent -2.33,-1.1 2.32,1.13, body extent -1.6,-0.8 1.6,0.8, height 1
CR3225-1210 [mm]
  rect 1.6x2.7 smd: 1(-1.4,0) 2(1.4,0)
  silkscreen extent -2.6,-1.75 2.6,1.75, body extent -1.7,-1.35 1.7,1.35, height 1.5
DIL-44-ESP32 [mil] "DIL, 44-Leads, Body 58,00x25,40mm, Pitch 2,54mm, IPC Low Density"
  rect 60x60 hole 35.43: 1(-500,1050)
  round 60 hole 35.43: 2(-500,950) 3(-500,850) 4(-500,750) 5(-500,650) 6(-500,550) 7(-500,450) 8(-500,350) 9(-500,250) 10(-500,150) 11(-500,50) 12(-500,-50) 13(-500,-150) 14(-500,-250) 15(-500,-350) 16(-500,-450) 17(-500,-550) 18(-500,-650) 19(-500,-750) 20(-500,-850) 21(-500,-950) 22(-500,-1050) 23(500,-1050) 24(500,-950) 25(500,-850) 26(500,-750) 27(500,-650) 28(500,-550) 29(500,-450) 30(500,-350) 31(500,-250) 32(500,-150) 33(500,-50) 34(500,50) 35(500,150) 36(500,250) 37(500,350) 38(500,450) 39(500,550) 40(500,650) 41(500,750) 42(500,850) 43(500,950) 44(500,1050)
  silkscreen extent -595,-1121 561,1378, body extent -554,-1124 552,1380, height 295
DS-P16 [mm]
  rect 2x2 hole 1.2: 1(-8.89,-3.81)
  round 2 hole 1.2: 2(-6.35,-3.81) 5(1.27,-3.81) 8(8.89,-3.81) 15(-6.35,3.81) 16(-8.89,3.81)
  silkscreen extent -10.3,-5.5 10.3,5.5, body extent -10.3,-5.5 10.3,5.5, height 10
"MCV1,5/9-G-3,5 - I" [mm] "Steckergrundgehäuse Phoenix Contact 9 polig RM 3,5 180°"
  rect 2x2 hole 1.2: 1(14,0)
  round 2 hole 1.2: 2(10.5,0) 3(7,0) 4(3.5,0) 5(0,0) 6(-3.5,0) 7(-7,0) 8(-10.5,0) 9(-14,0)
  silkscreen extent -16.45,-4.25 16.45,3, body extent -16.45,-4.25 16.45,3, height 11
"MSTBVA2,5/8-G - I" [mm] "Phoenix Contact Grundgehäuse, Nennstrom: 12 A, Bemessungsspannung: 250 V,  Raster: 5,0 mm, Polzahl: 8, Montageart: Löten"
  rect 2.5x2.5 hole 1.4: 1(17.5,0)
  round 2.5 hole 1.4: 2(12.5,0) 3(7.5,0) 4(2.5,0) 5(-2.5,0) 6(-7.5,0) 7(-12.5,0) 8(-17.5,0)
  silkscreen extent -21,-3.8 21,4.8, body extent -21,-3.8 21.01,4.8, height 12
SIP4_6mm [mm] "SIP 4 Gehäuse für DC/DC Wandler 1W"
  rect 1.3x1.3 hole 0.7: 1(-3.81,0)
  round 1.3 hole 0.7: 2(-1.27,0) 3(1.27,0) 4(3.81,0)
  silkscreen extent -5.75,-1.25 5.75,4.75, body extent -5.75,-1.25 5.75,4.75, height 10
SMB [mm]
  rect 2x2.5 smd: 1(-2.75,0) 2(2.75,0)
  silkscreen extent -2.3,-2 2.3,2, body extent -3.85,-2.1 3.85,2.1, height 2.4
SO14 [mm]
  rect 1.95x0.6 smd: 1(-2.55,3.81) 2(-2.55,2.54) 3(-2.55,1.27) 4(-2.55,0) 5(-2.55,-1.27) 6(-2.55,-2.54) 7(-2.55,-3.81) 8(2.55,-3.81) 9(2.55,-2.54) 10(2.55,-1.27) 11(2.55,0) 12(2.55,1.27) 13(2.55,2.54) 14(2.55,3.81)
  silkscreen extent -2.67,-4.4 1.18,4.79, body extent -2,-4.38 2,4.38, height 1.75
SOD323F [mm]
  rect 1.5x0.8 smd: 1(-1.25,0) 2(1.25,0)
  silkscreen extent -1,-0.62 1,0.63, body extent -1.5,-0.72 1.5,0.72, height 1
SOIC8 [mm]
  rect 1.95x0.6 smd: 1(-2.5,1.905) 2(-2.5,0.635) 3(-2.5,-0.635) 4(-2.5,-1.905) 5(2.5,-1.905) 6(2.5,-0.635) 7(2.5,0.635) 8(2.5,1.905)
  silkscreen extent -2.62,-2.5 1.12,2.88, body extent -1.95,-2.5 1.95,2.5, height 3
SOL-18 [mm]
  rect 2.54x0.635 smd: 1(-5.08,5.08) 2(-5.08,3.81) 3(-5.08,2.54) 4(-5.08,1.27) 5(-5.08,0) 6(-5.08,-1.27) 7(-5.08,-2.54) 8(-5.08,-3.81) 9(-5.08,-5.08) 10(5.08,-5.08) 11(5.08,-3.81) 12(5.08,-2.54) 13(5.08,-1.27) 14(5.08,0) 15(5.08,1.27) 16(5.08,2.54) 17(5.08,3.81) 18(5.08,5.08)
  silkscreen extent -2.92,-5.72 2.92,5.71, body extent -3.8,-5.8 3.8,5.8, height 2.65
SOT95P280X100-6N [mm]
  rect 1.05x0.55 smd: 1(-1.3,0.95) 2(-1.3,0) 3(-1.3,-0.95) 4(1.3,-0.95) 5(1.3,0) 6(1.3,0.95)
  silkscreen extent -1.82,-1.45 0.42,1.58, body extent -1.4,-1.45 1.4,1.45, height 1
SSOP-SS28_M [mm] "SOP, 28-Leads, Body 10.2x5.2mm, Pitch 0.65mm, IPC Low Density"
  rect 2.4x0.45 smd: 1(-3.5,4.225) 2(-3.5,3.575) 3(-3.5,2.925) 4(-3.5,2.275) 5(-3.5,1.625) 6(-3.5,0.975) 7(-3.5,0.325) 8(-3.5,-0.325) 9(-3.5,-0.975) 10(-3.5,-1.625) 11(-3.5,-2.275) 12(-3.5,-2.925) 13(-3.5,-3.575) 14(-3.5,-4.225) 15(3.5,-4.225) 16(3.5,-3.575) 17(3.5,-2.925) 18(3.5,-2.275) 19(3.5,-1.625) 20(3.5,-0.975) 21(3.5,-0.325) 22(3.5,0.325) 23(3.5,0.975) 24(3.5,1.625) 25(3.5,2.275) 26(3.5,2.925) 27(3.5,3.575) 28(3.5,4.225)
  silkscreen extent -3.62,-5.25 1.9,5.25, body extent -2.8,-5.25 2.8,5.25, height 2
TA-C [mm] "Molded Capacitor, 2-Leads, Body 6,0x3,2mm, IPC Medium Density"
  rect 3.4x3 smd: 1(-3,0) 2(3,0)
  silkscreen extent -3.42,-1.6 3,1.6, body extent -3,-1.6 3,1.6, height 1.8
TESTPOINT [mm]
  rect 1.4x1.4 hole 0.9: 1(0,0)
  silkscreen extent -0.8,-0.8 0.8,0.8, body extent -0.8,-0.8 0.8,0.8
WCAP-PSLP_D5H5.5 [mm] "Aluminum Polymer Capacitors, body diameter 5mm"
  rect 3x1.6 smd: 1(2.2,0) 2(-2.2,0)
  silkscreen extent -2.75,-2.75 2.75,2.75, body extent -3,-2.65 3,2.65, height 5.5

## Part data
3V3p 12V Gnd I5V I-GND: library part CMP-029-000001-1, "Test Point", E01_Value_1="(no part)", Kommentar="(no part)", Manufacturer="(no part)", Manufacturer Part Number="(no part)", Supplier=Mouser, Supplier Order Number="(no part)", Supplier Price 100pcs="(no part)"
C100 C101 C104 C106 C108 C112 C113 C114: library part CMP-018-000010-5, "SMD0603, X7R, 15%, 50V, 100nF", Manufacturer=KEMET, Manufacturer Part Number=C0603C104K5RAC7867, ComponentLink1Description="Manufacturer Link", ComponentLink1URL=https://www.kemet.com, ComponentLink2Description=Datasheet, ComponentLink2URL=https://www.mouser.de/datasheet/2/447/KEM_C1002_X7R_SMD-3316098.pdf, E01_Value_1=100n, Kommentar="Kondensator aus mehreren Keramikschichten MLCC - SMD/SMT 50V 0.1uF X7R 0603 10%", Supplier=Mouser, Supplier Order Number=80-C0603C104K5R7867, Supplier Price 100pcs="0,022 €"
C102: library part CMP-001-00009-1, "WCAP-PSLP Aluminum Polymer Capacitor, V-Chip SMT, D5 x H5.5mm, 47µF, 6.3V", Manufacturer="Wurth Elektronik", Manufacturer Part Number=875105142001, ComponentLink1Description="Website Link", ComponentLink1URL=https://www.we-online.com/redexpert/article/875105142001?ad, ComponentLink2Description="Datasheet Link", ComponentLink2URL=https://www.we-online.com/redexpert/spec/875105142001?ad, Supplier=Mouser, Supplier Order Number=710-875105142001
C103 C109: library part CMP-046-000011-6, "C 10N/50V, SMD-0603, X7R", Manufacturer="AVX GMBH", Manufacturer Part Number=06035C103KAT2A, Supplier=Mouser, Supplier Order Number=581-06035C103K
C105: library part CMP-046-000013-5, "Kondensator, MLCC, SMD 1206, 35V, 10uF, X7R,  10%", E01_Value_1=10u/35V, Manufacturer="TAIYO YUDEN EUR", Manufacturer Part Number=GMK316AB7106KL-TR, Supplier=Mouser, Supplier Order Number=963-GMK316AB7106KL, Supplier Price 100pcs="0,176 €"
C107: library part SMD_TAA_10u_1, "Tantal Elko 10uF / 10V", Manufacturer=KEMET, Manufacturer Part Number=T491C106K010AT, ComponentLink1Description="Manufacturer Link", ComponentLink1URL=https://www.kemet.com, ComponentLink2Description=Datasheet, ComponentLink2URL=https://www.mouser.de/datasheet/2/447/KEM_T2005_T491-3316937.pdf, E01_Value_1=10u/10V, Kommentar="Tantalkondensatoren - fest für SMD 10V 10uF 2312 10% ESR=1.8 Ohms", Supplier=Mouser, Supplier Order Number=80-T491C106K010, Supplier Price 100pcs="0,209 €"
C110: library part CMP-001-00069-1, "Multilayer Ceramic Capacitors MLCC - SMD/SMT 1kV 4700pF X7R 1206 10%", E01_Value_1=4700p, Manufacturer=YAGEO, Manufacturer Part Number=CC1206KKX7RCBB472, ComponentLink1Description="Manufacturer Link", ComponentLink1URL=https://www.yageo.com/en/Home, ComponentLink2Description=Datasheet, ComponentLink2URL=https://www.mouser.de/datasheet/2/447/UPY_GPHC_X7R_6_3V_to_250V_24-3441574.pdf, Supplier=Mouser, Supplier Order Number=603-CC126KKX7RCBB472, Supplier Price 100pcs="0,135 €"
C111: library part CMP-066-000007-6, E01_Value_1=10u, Manufacturer="TDK ELECTRONICS", Manufacturer Part Number=C1608X5R1A106M080AC, Supplier=Mouser, Supplier Order Number=810-C1608X5R1A106M
C200 C201 C202 C203 C204 C205 C206 C207 C208 C209 C210 C211: library part CMP-018-000014-2, "SMD0603, X7R, 15%, 50V, 470nF", Manufacturer=KEMET, Manufacturer Part Number=C0805C474K5RACAUTO, ComponentLink1Description="Manufacturer Link", ComponentLink1URL=https://www.kemet.com, ComponentLink2Description=Datasheet, ComponentLink2URL=https://www.mouser.de/datasheet/2/447/KEM_C1023_X7R_AUTO_SMD-3316698.pdf, E01_Value_1=470n, Kommentar="Kondensator aus mehreren Keramikschichten MLCC - SMD/SMT 50V 0.47uF X7R 0805 10% AEC-Q200", Supplier=Mouser, Supplier Order Number=80-C0805C474K5RAUTO, Supplier Price 100pcs="0,084 €"
C300 C301 C302 C303: library part CMP-018-000010-5, "SMD0603, X7R, 15%, 50V, 100nF", E01_Value_1=100n, Manufacturer=KEMET, Manufacturer Part Number=C0603C104K5RAC7867, ComponentLink1Description="Manufacturer Link", ComponentLink1URL=https://www.kemet.com, ComponentLink2Description=Datasheet, ComponentLink2URL=https://www.mouser.de/datasheet/2/447/KEM_C1002_X7R_SMD-3316098.pdf, Kommentar="Kondensator aus mehreren Keramikschichten MLCC - SMD/SMT 50V 0.1uF X7R 0603 10%", Supplier=Mouser, Supplier Order Number=80-C0603C104K5R7867, Supplier Price 100pcs="0,022 €"
D200 D202 D204 D206 D208 D210 D212 D214 D216 D218 D220 D222: library part SMBJ20A, "20V UNIDIRECTIONAL TRANSIENT VOLTAGE SUPPRESSOR", Manufacturer=STMicroelectronics, ComponentLink1Description="Manufacturer Link", ComponentLink1URL=https://www.st.com/, ComponentLink2Description=Datasheet, ComponentLink2URL=https://www.mouser.de/datasheet/2/389/cd00001366-1795574.pdf, E01_Value_1=SMBJ20A-TR, Kommentar="ESD-Entstörer/TVS-Dioden Transil", Manufacturer Part Number=SMBJ20A-TR, Supplier=Mouser, Supplier Order Number=511-SMBJ20A-TR, Supplier Price 100pcs="0,24 €"
D201 D203 D205 D207 D209 D211 D213 D215 D217 D219 D221 D223: "Small Signal Fast Switching Diodes 250mA", Manufacturer=Nexperia, Manufacturer Part Number=BAS316,135, ComponentLink1Description="Manufacturer Link", ComponentLink1URL=https://www.nxp.com/, ComponentLink2Description=Datasheet, ComponentLink2URL=https://www.mouser.de/datasheet/2/916/BAS316-3081362.pdf, E01_Value_1=BAS316, Kommentar="Dioden (Allzweck, Leistung, Schaltung) BAS316/SOD323/SOD2", Supplier=Mouser, Supplier Order Number=771-BAS316135, Supplier Price 100pcs="0,034 €"
J200 J201 J202: library part CMP-019-000007-1, "Phoneix Contact 9 pole connector Male RM3,5", Manufacturer="Phoenix Contact", Manufacturer Part Number=1843677, ComponentLink1Description="Manufacturer Link", ComponentLink1URL=http://www.phoenixcontact.de/, ComponentLink2Description=Datasheet, ComponentLink2URL=https://www.phoenixcontact.com/us/products/1843677/pdf, E01_Value_1="MCV 1,5/ 9-G-3,5", Kommentar="Steckbare Anschlussblöcke 9 Pos 3.5mm pitch Through Hole Header", Supplier=Mouser, Supplier Order Number=651-1843677, Supplier Price 100pcs="2,81 €"
J300 J301 J302: library part CMP-019-000004-1, "Phoneix Contact 8 pole connector Male RM5mm", Manufacturer="Phoenix Contact", Manufacturer Part Number=1755574, ComponentLink1Description="Manufacturer Link", ComponentLink1URL=http://www.phoenixcontact.de/, ComponentLink2Description=Datasheet, ComponentLink2URL=https://www.phoenixcontact.com/us/products/1755574/pdf, E01_Value_1="MSTBVA 2,5/ 8-G", Kommentar="Steckbare Anschlussblöcke 8 Pos 5mm pitch Through Hole Header", Supplier=Mouser, Supplier Order Number=651-1755574, Supplier Price 100pcs="1,90 €"
K300 K301 K302 K303 K304 K305 K306 K307 K308 K309 K310 K311: library part CMP-015-000010-1, "8 A MINIATURE BIPOLAR POWER RELAY", ComponentLink1Description="Manufacturer Link", ComponentLink1URL=www.panasonic.com, E01_Value_1=DSP1a-L2-DC12V, Supplier=Mouser, Supplier Order Number=769-DSP1A-L2-DC12V
L100 L101: library part CMP-006-00001-3, "Ferritperlen BMC-Q 0603 600R 25% Tol. High Current", Manufacturer="TE Connectivity", ComponentLink1Description="Datasheet Link", ComponentLink1URL=https://www.mouser.de/datasheet/2/418/9/ENG_DS_1773178_3_A1-3474112.pdf, Kommentar="Ferritperlen BMC-Q 0603 600R 25% Tol. High Current", Manufacturer Part Number=BMC-Q1JY0600H, Supplier=Mouser, Supplier Order Number=710-742862160, Supplier Price 100pcs="0,095 €"
L102: "FIXED IND 3.3UH 1.34A 75MOHM SMD", Manufacturer=ABRACON, ComponentLink1Description="Manufacturer Link", ComponentLink1URL=https://abracon.com/, ComponentLink2Description=Datasheet, ComponentLink2URL=https://www.mouser.de/datasheet/2/3/ASPI-4020S-1775177.pdf, E01_Value_1=ASPI-4020S-3R3M-T, Kommentar="Leistungsinduktivitäten – SMD FIXED IND 3.3UH 1.4A 70 MOHM SMD", Manufacturer Part Number=ASPI-4020S-3R3M-T, Supplier=Mouser, Supplier Order Number=815-ASPI-4020S-3R3MT, Supplier Price 100pcs="0,143 €"
L103 L300 L301 L302 L303 L304 L305 L306 L307 L308 L309 L310 L311 L312 L313 L314 L315 L316 L317 L318 L319 L320 L321 L322 L323 L324 L325 L326 L327 L328 L329 L330 L331 L332 L333 L334 L335: library part CMP-006-00002-1, "Ferritperlen WE-CBF 0603 100MHz 600Ohm 1000mA AEC-Q200", E01_Value_1="600Ohm, 1A", Manufacturer=Würth, ComponentLink1Description="Datasheet Link", ComponentLink1URL=https://www.we-online.com/components/products/datasheet/742792651.pdf, Kommentar="Ferritperlen WE-CBF 0603 100MHz 600Ohm 1000mA AEC-Q200", Manufacturer Part Number=742792651, Supplier=Mouser, Supplier Order Number=710-742792651, Supplier Price 100pcs="0,157 €"
L200 L201 L202 L203 L204 L205 L206 L207 L208 L209 L210 L211: library part CMP-023-000002-2, "HF-Induktivitäten – SMD SMT-INDUCTOR1210-H 330UH 5%, AEC-Q200", E01_Value_1=B82422-H1334, Manufacturer="EPCOS / TDK", Manufacturer Part Number=B82422H1334J000, ComponentLink1Description="Manufacturer Link", ComponentLink1URL=https://www.tdk-electronics.tdk.com, ComponentLink2Description=Datasheet, ComponentLink2URL=https://product.tdk.com/system/files/dam/doc/product/inductor/inductor/smd/data_sheet/30/db/ind_2008/b82422h.pdf?ref_disty=mouser, Kommentar="HF-Induktivitäten – SMD SMT-INDUCTOR1210-H 330UH 5%, AEC-Q200", Supplier=Mouser, Supplier Order Number=871-B82422H1334J000, Supplier Price 100pcs="0,32 €"
P101: library part CMP-067-000001-1, "WR-PHD Pin Header, SMT, pitch 2.54mm, Dual Row, Vertical, 14p", Manufacturer="Wurth Elektronik", Manufacturer Part Number=61031421121, Supplier=Mouser, Supplier Order Number=710-61031421121
R100: library part S0603_31k6_1, "SMD0603, 0.1W, TK100, 1%, 31.6k", Manufacturer="Vishay / Dale", Manufacturer Part Number=CRCW060331K6FKEAC, ComponentLink1Description="Manufacturer Link", ComponentLink1URL=https://www.vishay.com/, ComponentLink2Description=Datasheet, ComponentLink2URL=https://www.vishay.com/docs/20035/dcrcwe3.pdf, E01_Value_1=31k6, Kommentar="Dickfilmwiderstände - SMD 1/10W 31.6Kohms 1% Commercial Use", Supplier=Mouser, Supplier Order Number=71-CRCW060331K6FKEAC, Supplier Price 100pcs="0,008 €"
R101: library part S0603_47k, "RES 47K OHM 1% 1/10W 0603", Manufacturer="Vishay / Dale", Manufacturer Part Number=CRCW060347K0FKED, ComponentLink1Description="Manufacturer Link", ComponentLink1URL=https://www.vishay.com/, ComponentLink2Description=Datasheet, ComponentLink2URL=https://www.vishay.com/doc?28773, E01_Value_1=47k, Kommentar="Dickfilmwiderstände - SMD D11/CRCW0603 100 47K 1% ET3 E3", Supplier=Mouser, Supplier Order Number=71-CRCW060347K0FKED, Supplier Price 100pcs="0,012 €"
R102 R103: library part CMP-027-000005-4, "SMD0603, 0.1W, TK100, 1%, 10k", E01_Value_1=10K, Manufacturer="Vishay / Dale", Manufacturer Part Number=CRCW060310K0FKEAC, ComponentLink1Description="Manufacturer Link", ComponentLink1URL=https://www.vishay.com/, ComponentLink2Description=Datasheet, ComponentLink2URL=https://www.vishay.com/docs/20035/dcrcwe3.pdf, Kommentar="Dickfilmwiderstände - SMD 1/10Watt 10Kohms 1% Commercial Use", Supplier=Mouser, Supplier Order Number=71-CRCW060310K0FKEAC, Supplier Price 100pcs="0,011 €"
R104 R105: library part CMP-038-000005-4, "Dünnfilmwiderstände - SMD .1W 4.7Kohms 1% 0603 50ppm Auto", Manufacturer="Vishay / Beyschlag", Manufacturer Part Number=MCT06030C4701FP500, ComponentLink1Description="Manufacturer Link", ComponentLink1URL=https://www.mouser.de/manufacturer/beyschlag/, ComponentLink2Description=Datasheet, ComponentLink2URL=https://www.vishay.com/docs/28700/mcx0x0xpre.pdf, E01_Value_1=4k7, Kommentar="Dünnfilmwiderstände - SMD .1W 4.7Kohms 1% 0603 50ppm Auto", Supplier=Mouser, Supplier Order Number=594-MCT06030C4701FP5, Supplier Price 100pcs="0,025 €"
R200 R204 R208 R212 R216 R220 R224 R228 R232 R236 R240 R244 R302 R306: library part S0603_1k0_1_1, "SMD0603, 0.1W, TK100, 1%, 1,0k, Metallfilm", Manufacturer="Vishay / Dale", Manufacturer Part Number=CRCW06031K00FKEAC, ComponentLink1Description="Manufacturer Link", ComponentLink1URL=https://www.vishay.com/, ComponentLink2Description=Datasheet, ComponentLink2URL=https://www.vishay.com/docs/20035/dcrcwe3.pdf, E01_Value_1=1k0, Kommentar="Dickfilmwiderstände - SMD 1/10Watt 1Kohms 1% Commercial Use", Supplier=Mouser, Supplier Order Number=71-CRCW06031K00FKEAC, Supplier Price 100pcs="0,007 €"
R201 R202 R205 R207 R209 R210 R213 R215 R217 R218 R221 R223 R225 R226 R229 R231 R233 R234 R237 R239 R241 R242 R245 R247 R248 R249: library part S0603_3k3_1, "Resistor", Manufacturer="Vishay / Dale", Manufacturer Part Number=CRCW06033K30FKEBC, ComponentLink1Description="Manufacturer Link", ComponentLink1URL=https://www.vishay.com/, ComponentLink2Description=Datasheet, ComponentLink2URL=https://www.vishay.com/docs/20035/dcrcwe3.pdf, E01_Value_1=3k3, Kommentar="Dickfilmwiderstände - SMD 1/10Watt 3.3Kohms 1% Commercial Use", Supplier=Mouser, Supplier Order Number=71-CRCW06033K30FKEBC, Supplier Price 100pcs="0,012 €"
R203 R206 R211 R214 R219 R222 R227 R230 R235 R238 R243 R246: library part CMP-012-000010-3, "Resistor", Manufacturer="Vishay / Dale", Manufacturer Part Number=CRCW06031K50FKEAC, ComponentLink1Description="Manufacturer Link", ComponentLink1URL=https://www.vishay.com/, ComponentLink2Description=Datasheet, ComponentLink2URL=https://www.vishay.com/docs/20035/dcrcwe3.pdf, E01_Value_1=1k5, Kommentar="Dickfilmwiderstände - SMD 1/10Watt 1.5Kohms 1% Commercial Use", Supplier=Mouser, Supplier Order Number=71-CRCW06031K50FKEAC, Supplier Price 100pcs="0,008 €"
R252 R253: library part CMP-038-000000-2, "SMD0603, 0.1W, TK100, 1%, 0 Ohm, Metallfilm", Manufacturer="Vishay / Beyschlag", Manufacturer Part Number=MCT0603MZ0000ZP500, ComponentLink1Description="Manufacturer Link", ComponentLink1URL=https://www.vishay.com/, ComponentLink2Description=Datasheet, ComponentLink2URL=https://www.vishay.com/docs/28952/mcs0402at-mct0603at-mcu0805at-mca1206at.pdf, E01_Value_1=0R, Kommentar="Dünnfilmwiderstände - SMD .1W ZEROohm Jumper", Supplier=Mouser, Supplier Order Number=594-MCT0603MZ0000ZP5, Supplier Price 100pcs="0,052 €"
R300 R301 R303 R304 R305 R307: library part S0603x4_NET_4k7, "Widerstandsnetzwerk * 4", ComponentLink1Description="Manufacturer Link", ComponentLink2Description=Datasheet, ComponentLink2URL=c:\Entwicklungen\Datenblätter\Phicomp\73105.pdf, E01_Value_1=4k7, Supplier=Mouser, Supplier Order Number=652-CR0603-JW-472ELF
U100: library part CMP-020-00001-8, "SMD mod, ESP32-S3R8 with 3.3V, 8MB Octal PSRAM die insid, 6MBQuad SPI flash, pcb ant", Max Operating Temperature=65°C, Max Supply Voltage=3.6V, Min Operating Temperature=-40°C, Min Supply Voltage=3V
U101: "4.2V TO 18V INPUT, 2A LOW IQ SYNCHRONOUS BUCK CONVERTER", Manufacturer="Diodes Incorporated", ComponentLink1Description="Manufacturer Link", ComponentLink1URL=https://www.diodes.com/, ComponentLink2Description=Datasheet, ComponentLink2URL=https://www.mouser.de/datasheet/2/115/AP62200_AP62201_AP62200T-3194967.pdf, E01_Value_1=AP62200WU-7, Kommentar="Schaltspannungsregler DCDC Conv HV Buck TSOT26(STD) T&R 3K", Manufacturer Part Number=AP62200WU-7, Supplier=Mouser, Supplier Order Number=621-AP62200WU-7, Supplier Price 100pcs="0,228 €"
U102: "DC/DC Wandler 1W 12V/5V Isolation 1000V", Manufacturer="Floeth Electronic", ComponentLink1Description="Manufacturer Link", ComponentLink1URL=www.floeth-electronic.com, ComponentLink2Description=Datasheet, ComponentLink2URL=https://floeth-electronic.com/wordpress/wp-content/uploads/2021/07/Seite-101-SL4U.pdf, E01_Value_1=SL4U-1205, Kommentar="DC-DC-Converter 12V zu 5V, 200mA", Manufacturer Part Number=SL4U-1205, Supplier=Mouser, Supplier Order Number=SL4U-1205
U200 U201: library part 74HCT14D, "Hex Schmitt-Trigger Inverter", Manufacturer="Texas Instruments", ComponentLink1Description="Manufacturer Link", ComponentLink1URL=https://www.nxp.com/, ComponentLink2Description=Datasheet, ComponentLink2URL=https://www.ti.com/lit/gpn/sn74hct14, E01_Value_1=SN74HCT14DR, Kommentar="Inverter Hex Schmitt-Trigger Inverter", Manufacturer Part Number=SN74HCT14DR, Supplier=Mouser, Supplier Order Number=595-SN74HCT14DR, Supplier Price 100pcs="0,119 €"
U300 U301: library part CMP-015-000011-1, "16-Bit I/O Expander with Serial Interface, 28-Pin SSOP, Extended Temperature", Manufacturer=Microchip, ComponentLink1Description="Manufacturer Link", ComponentLink1URL=http://www.microchip.com/, ComponentLink2Description=Datasheet, ComponentLink2URL=http://ww1.microchip.com/downloads/en/DeviceDoc/21952b.pdf, E01_Value_1=MCP23017-E/SS, Kommentar="Schnittstelle - I/O-Erweiterer 16bit Input/Output Exp I2C interface", Manufacturer Part Number=MCP23017-E/SS, Supplier=Mouser, Supplier Order Number=579-MCP23017-E/SS, Supplier Price 100pcs=1,19€
V200 V201 V202 V203 V204 V205: "Dual SMD Optocoupler CTR > 100%", Manufacturer="Vishay Semiconductors", ComponentLink1Description="Manufacturer Link", ComponentLink1URL=https://www.vishay.com/, ComponentLink2Description=Datasheet, ComponentLink2URL=https://www.vishay.com/doc?83647, E01_Value_1=ILD213T, Kommentar="Transistor-Ausgangsoptokoppler Phototransistor Out Dual CTR >100%", Manufacturer Part Number=ILD213T, Supplier=Mouser, Supplier Order Number=782-ILD213T, Supplier Price 100pcs="0,586 €"
V300 V301 V302 V303: library part CMP-031-000016-1, "8-fach Darlington Transistor Array", Manufacturer=Toshiba, ComponentLink1Description="Manufacturer Link", ComponentLink1URL=https://toshiba.semicon-storage.com, ComponentLink2Description=Datasheet, ComponentLink2URL=https://www.mouser.de/datasheet/2/408/TBD62083AFWG_datasheet_en_20160511-769679.pdf, E01_Value_1=TBD62083AFWG,EL, Kommentar="Gate-Treiber DMOS Transistor Array 8-CH, 50V/0.5A", Manufacturer Part Number=TBD62083AFWG,EL, Supplier=Mouser, Supplier Order Number=757-TBD62083AFWGEL, Supplier Price 100pcs="0,707 €"

## Via types
v1: diameter 0.6, hole 0.3, Top Layer to Bottom Layer, 260 vias

## Nets (pads, with @x,y where several pads share a name; then routed paths per layer and width w, separated by ;. In a path a pad name is that pad's centre, name@x,y a point inside that pad or via, vN(x,y) a via of type N, cw(c..) or ccw(c..) an arc to the next point about the centre after c; other vN are vias at no path point)
3V3p: 3V3p.1 C103.1 C111.1 C112.2 C113.2 C301.2 C303.2 J202.8 L100.2 P101.1 P101.3 R103.2 R104.2 R105.2 U100.1 U100.2 U200.14 U201.14 U300.9 U301.9 U301.15 V200.6 V200.8 V201.6 V201.8 V202.6 V202.8 V203.6 V203.8 V204.6 V204.8 V205.6 V205.8 | length 85.4
  Top Layer w0.3: U300.9@-80.779,-9.058 -80.779,-8.591 -80.754,-8.566 -80.779,-8.542 -80.779,-6.761 -80.264,-6.246 C301.2@-80.264,-6.196 v1(-80.264,-5.219) ; v1(-63.531,-20.548) -60.872,-17.89 -60.872,-17.273 -60.29,-16.691 -60.29,-15.716 U301.15@-60.215,-15.641 ; U301.9@-56.965,-8.641 -56.965,-6.758 -56.454,-6.246 C303.2@-56.454,-6.196 -56.204,-5.946 -56.204,-5.697 -55.992,-5.484 v1(-55.992,-5.349) ; R103.2@-20.008,-23.502 -20.002,-23.495 -18.576,-23.495 v1(-18.569,-23.488) ; C112.2@-19.628,-30.648 -19.616,-30.661 -18.131,-30.661 C111.1@-18.119,-30.673 -15.484,-30.673 U100.1@-15.47,-30.658 U100.2@-12.93,-30.658 ; C103.1@57.526,-2.32 57.486,-2.28 57.486,-1.421 L100.2@57.446,-1.381 v1(58.421,-1.381) 60.454,-1.381 61.481,-2.408 3V3p.1@62.811,-2.408
  Top Layer w0.6: P101.3@-34.979,-23.488 -34.988,-23.497 -34.988,-26.02 P101.1@-34.979,-26.028 -31.774,-26.028 -31.229,-25.483 -31.129,-25.483 -31.129,-25.556 -29.957,-25.556 v1(-29.929,-25.528)
  Bottom Layer w0.3: v1(-81.429,-3.308) -81.429,-3.235 -81.263,-3.069 -80.222,-3.069 -80.216,-3.075 -80.216,-3.99 -79.83,-4.376 -78.981,-4.376 -78.325,-3.721 -78.321,-3.721 -77.826,-3.226 -77.826,-2.55 V200.6@-77.676,-2.4 ; v1(-68.741,-2.642) -68.66,-2.642 -68.41,-2.392 V201.8@-67.116,-2.392 ; v1(-64.601,-4.66) -64.588,-4.648 -64.588,-2.404 V201.6@-64.576,-2.392 ; v1(-56.272,-2.401) V202.8@-54.029,-2.4 -54.029,-3.075 -53.879,-3.225 -53.704,-3.225 -53.204,-3.725 -52.139,-3.725 -51.489,-3.075 V202.6@-51.489,-2.4 ; v1(-44.264,-2.642) -44.206,-2.584 -43.556,-2.584 -43.364,-2.392 -40.944,-2.392 V203.8@-40.936,-2.4 -40.936,-3.075 -40.286,-3.725 -39.046,-3.725 -38.396,-3.075 V203.6@-38.396,-2.4 ; v1(-15.689,-2.921) -15.082,-2.921 -14.932,-2.771 V204.8@-14.932,-2.4 ; v1(-14.09,-7.294) -13.274,-6.478 -12.576,-6.478 -11.818,-5.719 -11.818,-4.546 -12.387,-3.976 -12.387,-2.404 V204.6@-12.392,-2.4 ; v1(-5.469,-2.725) -1.895,-2.725 V205.8@-1.895,-1.725 ; U200.14@-3.229,-11.275 -3.219,-11.265 v1(-2.04,-11.265) ; V205.8@-1.895,-2.4 V205.8@-1.895,-1.725 ; -1.451,-1.28 V205.8@-1.895,-1.725 ; V205.6@0.645,-2.4 0.623,-2.379 0.623,-1.167 -0.088,-1.167 -0.181,-1.075 -1.07,-1.075 -1.245,-1.075 V205.8@-1.895,-1.725 ; U201.14@17.51,-11.275 17.51,-9.678 v1(18.063,-9.125) ; v1(22.941,-26.084) 22.941,-26.166 23.021,-26.245 23.021,-27.098 23.271,-27.348 R104.2@23.321,-27.348 ; v1(26.159,-26.175) 26.159,-27.278 R105.2@26.229,-27.348
  other v1: -81.604,-24.292 -61.596,-4.903
12V: 12V.1 C104.1 C106.2 J201.6 J201.7 J202.7 L101.1 L300.1 L301.1 L306.1 L307.1 L312.1 L313.1 L318.1 L319.1 L324.1 L325.1 L330.1 L331.1 P101.5 P101.7 U102.2 V300.10 V301.10 V302.10 V303.10 | length 285.2
  Top Layer w0.3: P101.5@-35.004,-20.965 -34.988,-20.948 P101.5@-34.979,-20.948 ; P101.7@-34.988,-18.408 P101.7@-34.979,-18.408
  Top Layer w0.8: 32.861,-0.859 C106.2@35.671,-0.859 38.452,-0.859
  Top Layer w1: P101.5@-34.988,-20.948 -34.988,-19.678 P101.7@-34.988,-18.417 ; -2.59,13.892 J201.7@-2.59,15.917 ; 29.791,5.617 29.791,3.758 29.218,3.185 29.218,1.104 U102.2@29.161,1.046 31.066,-0.859 32.861,-0.859 ; 38.452,-0.859 39.332,-1.739 39.332,-7.308 38.747,-7.893 38.747,-19.972 42.452,-23.677 v1(42.452,-30.102)
  Top Layer w1.5: -34.988,-19.678 -33.016,-19.678 -32.137,-18.8 -32.137,7.227 -25.472,13.892 -2.59,13.892 14.246,13.892 15.221,12.917 15.221,8.18 17.784,5.617 29.791,5.617 v1(31.671,5.617)
  MidLayer1 w1: v1(31.671,5.617) 31.145,6.142 31.145,6.971 32.966,8.792 51.433,8.792 ; J202.7@51.421,15.917 51.421,8.804 51.433,8.792 ; 12V.1@62.811,2.672 56.691,8.792 51.433,8.792
  Bottom Layer w0.3: V300.10@-74.724,-29.188 -74.724,-30.356 -73.677,-30.356 -72.992,-29.671 -71.499,-29.671 -69.592,-31.579 -69.592,-34.214 v1@-69.579,-34.227 ; V302.10@-50.399,-25.896 -50.399,-29.586 -47.997,-31.988 -45.427,-31.988 -43.687,-33.728 -43.687,-34.118 v1@-43.579,-34.227 ; v1(15.99,-35.341) 15.99,-33.741 17.032,-32.699 20.283,-32.699 21.171,-33.587 v1(21.171,-34.227) L324.1@21.171,-35.083
  Bottom Layer w0.6: L300.1@-82.579,-35.083 v1(-82.579,-34.227) ; v1(-69.592,-34.227) -69.592,-35.071 L301.1@-69.579,-35.083 ; L306.1@-56.579,-35.083 v1(-56.579,-34.227) ; v1(-43.592,-34.227) -43.592,-35.071 L307.1@-43.579,-35.083 ; v1(-30.842,-34.227) -30.842,-35.071 L312.1@-30.829,-35.083 ; L313.1@-17.749,-35.083 v1(-17.749,-34.227) ; v1(-4.842,-34.227) -4.842,-35.071 L318.1@-4.829,-35.083 ; J201.7@-2.59,15.917 -2.59,15.538 -1.64,14.588 C104.1@-1.64,12.367 ; L319.1@8.171,-35.008 8.221,-34.958 8.221,-34.285 8.383,-34.123 v1(8.383,-34.068) ; v1(31.671,5.617) L101.1@45.871,5.617 ; L325.1@34.151,-35.058 v1(34.151,-34.627) ; V301.10@39.501,-26.438 39.501,-25.486 40.739,-24.248 51.399,-24.248 51.751,-24.599 51.751,-29.647 v1(47.171,-34.227) L330.1@47.171,-35.083 ; L331.1@60.171,-35.058 v1(60.171,-34.227)
  Bottom Layer w1: v1(42.452,-34.283) v1(42.452,-30.102)
"-K1 Reset": L304.1 V302.18 | length 30.5
  MidLayer1 w0.3: v1(-81.329,-37.208) -81.329,-35.558 -75.442,-29.671 -70.991,-29.671 -68.741,-27.421 -62.434,-27.421 v1(-60.559,-29.296)
  Bottom Layer w0.3: v1(-60.559,-29.296) V302.18@-60.559,-25.896
  Bottom Layer w0.6: v1(-81.329,-37.208) L304.1@-81.329,-36.633
"-K1 Set": L302.1 V300.18 | length 26.7
  Top Layer w0.3: v1(-81.165,-26.578) -76.999,-26.578 -75.78,-27.797 v1(-75.78,-35.062)
  Bottom Layer w0.3: V300.18@-84.884,-29.188 -84.884,-27.707 -83.756,-26.578 v1(-81.165,-26.578) ; L302.1@-80.079,-35.083 -80.079,-33.919 -78.879,-32.718 -76.44,-32.718 -75.78,-33.379 v1(-75.78,-35.062)
"-K2 Reset": L305.1 V302.17 | length 24.2
  MidLayer2 w0.3: v1(-68.329,-37.208) v1(-68.329,-24.14)
  Bottom Layer w0.3: v1(-68.329,-37.208) L305.1@-68.329,-36.633 ; v1(-68.329,-24.14) -59.696,-24.14 -59.289,-24.546 V302.17@-59.289,-25.896
"-K2 Set": L303.1 V300.17 | length 36.7
  Bottom Layer w0.3: V300.17@-83.614,-29.188 -83.614,-30.475 -83.959,-30.82 -85.559,-30.82 -85.559,-26.412 -84.975,-25.828 -68.456,-25.828 -64.928,-29.356 -64.928,-31.772 -67.079,-33.924 L303.1@-67.079,-35.083
"-K3 Reset": L310.1 V302.16 | length 13.9
  MidLayer2 w0.3: v1(-55.329,-37.208) v1(-55.329,-30.007)
  Bottom Layer w0.3: V302.16@-58.019,-25.896 -58.019,-28.921 -56.933,-30.007 v1(-55.329,-30.007) ; v1(-55.329,-37.208) L310.1@-55.329,-36.633
"-K3 Set": L308.1 V300.16 | length 48.8
  Bottom Layer w0.3: V300.16@-82.344,-29.188 -82.344,-30.729 -82.943,-31.328 -85.792,-31.328 -86.072,-31.048 -86.072,-25.562 -85.757,-25.248 -68.329,-25.248 -62.3,-31.277 -55.308,-31.277 -54.079,-32.505 L308.1@-54.079,-35.083
"-K4 Reset": L311.1 V302.15 | length 24.4
  MidLayer2 w0.3: v1(-53.301,-29.829) -43.548,-29.829 -42.303,-31.075 v1(-42.303,-37.208)
  Bottom Layer w0.3: V302.15@-56.749,-25.896 -56.749,-27.797 -55.606,-28.94 -54.19,-28.94 v1(-53.301,-29.829) ; L311.1@-42.329,-36.633 -42.316,-36.647 -42.316,-37.195 v1(-42.303,-37.208)
"-K4 Set": L309.1 V300.15 | length 59.6
  MidLayer1 w0.3: v1(-80.403,-27.328) -79.653,-28.078 -70.105,-28.078 -68.948,-26.921 -52.244,-26.921 -51.534,-27.631 -49.548,-27.631 -48.899,-28.28 -37.147,-28.28 v1(-35.267,-30.159)
  Bottom Layer w0.3: V300.15@-81.074,-29.188 -81.074,-28.236 -80.498,-27.66 -80.498,-27.424 v1(-80.403,-27.328) ; L309.1@-41.079,-35.083 -41.079,-31.048 -40.19,-30.159 v1(-35.267,-30.159)
"-K5 Reset": L316.1 V302.14 | length 35.9